# Altium PCB Gas Analyser O2 CO2.PcbDoc
Units mm, origin at the board's own origin, x right, y up, seen from the top; angles counter-clockwise.
Board outline 90 x 80 mm, 4 copper layers (Top Layer, Int1 (GND), Int2 (PWR), Bottom Layer), stack 1.369 mm thick; 96 components, 64 nets, 360 pads, 121 vias.
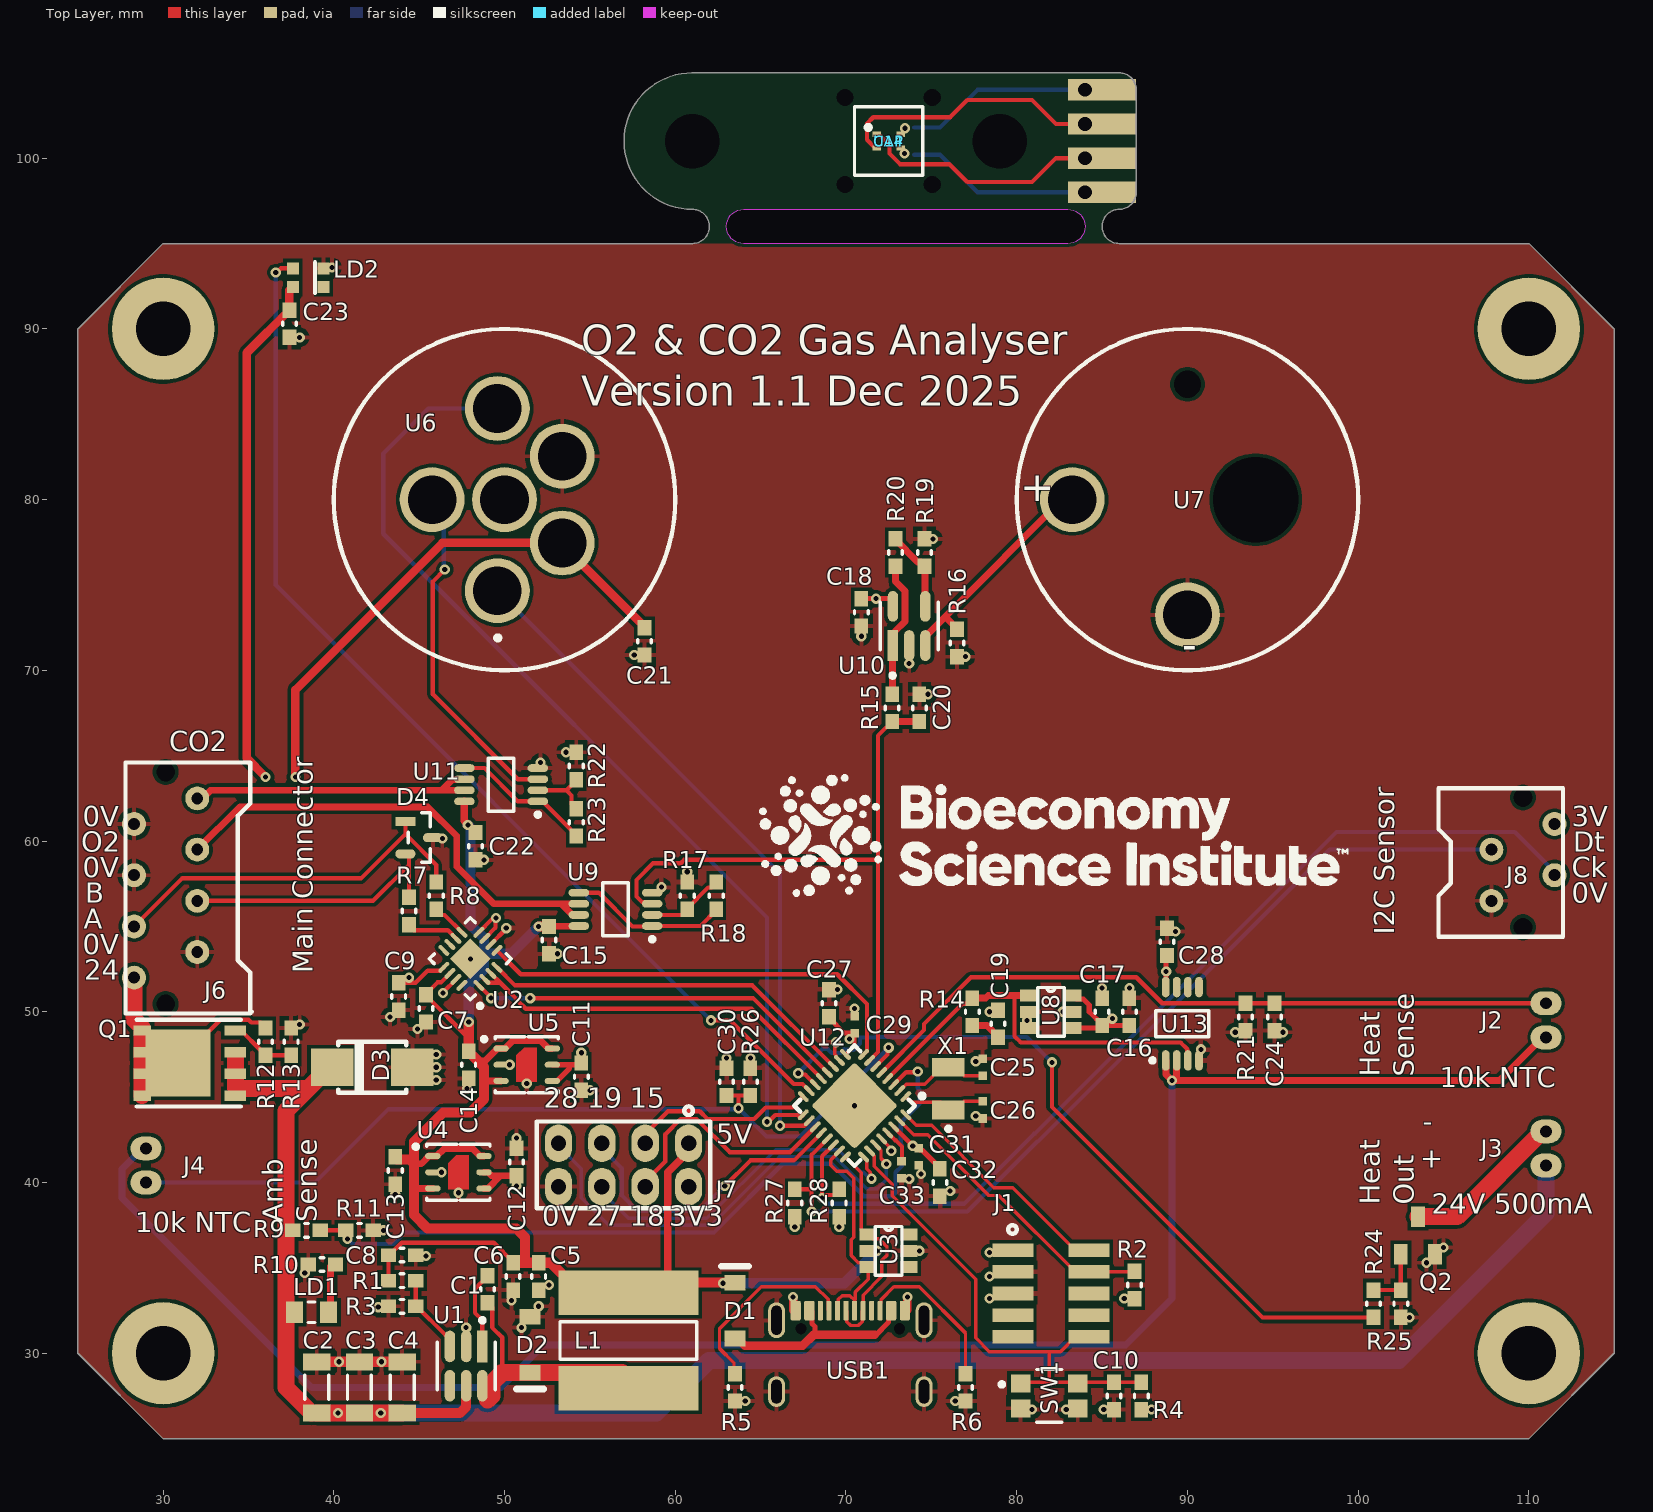
[diagram p0: Top Layer view]
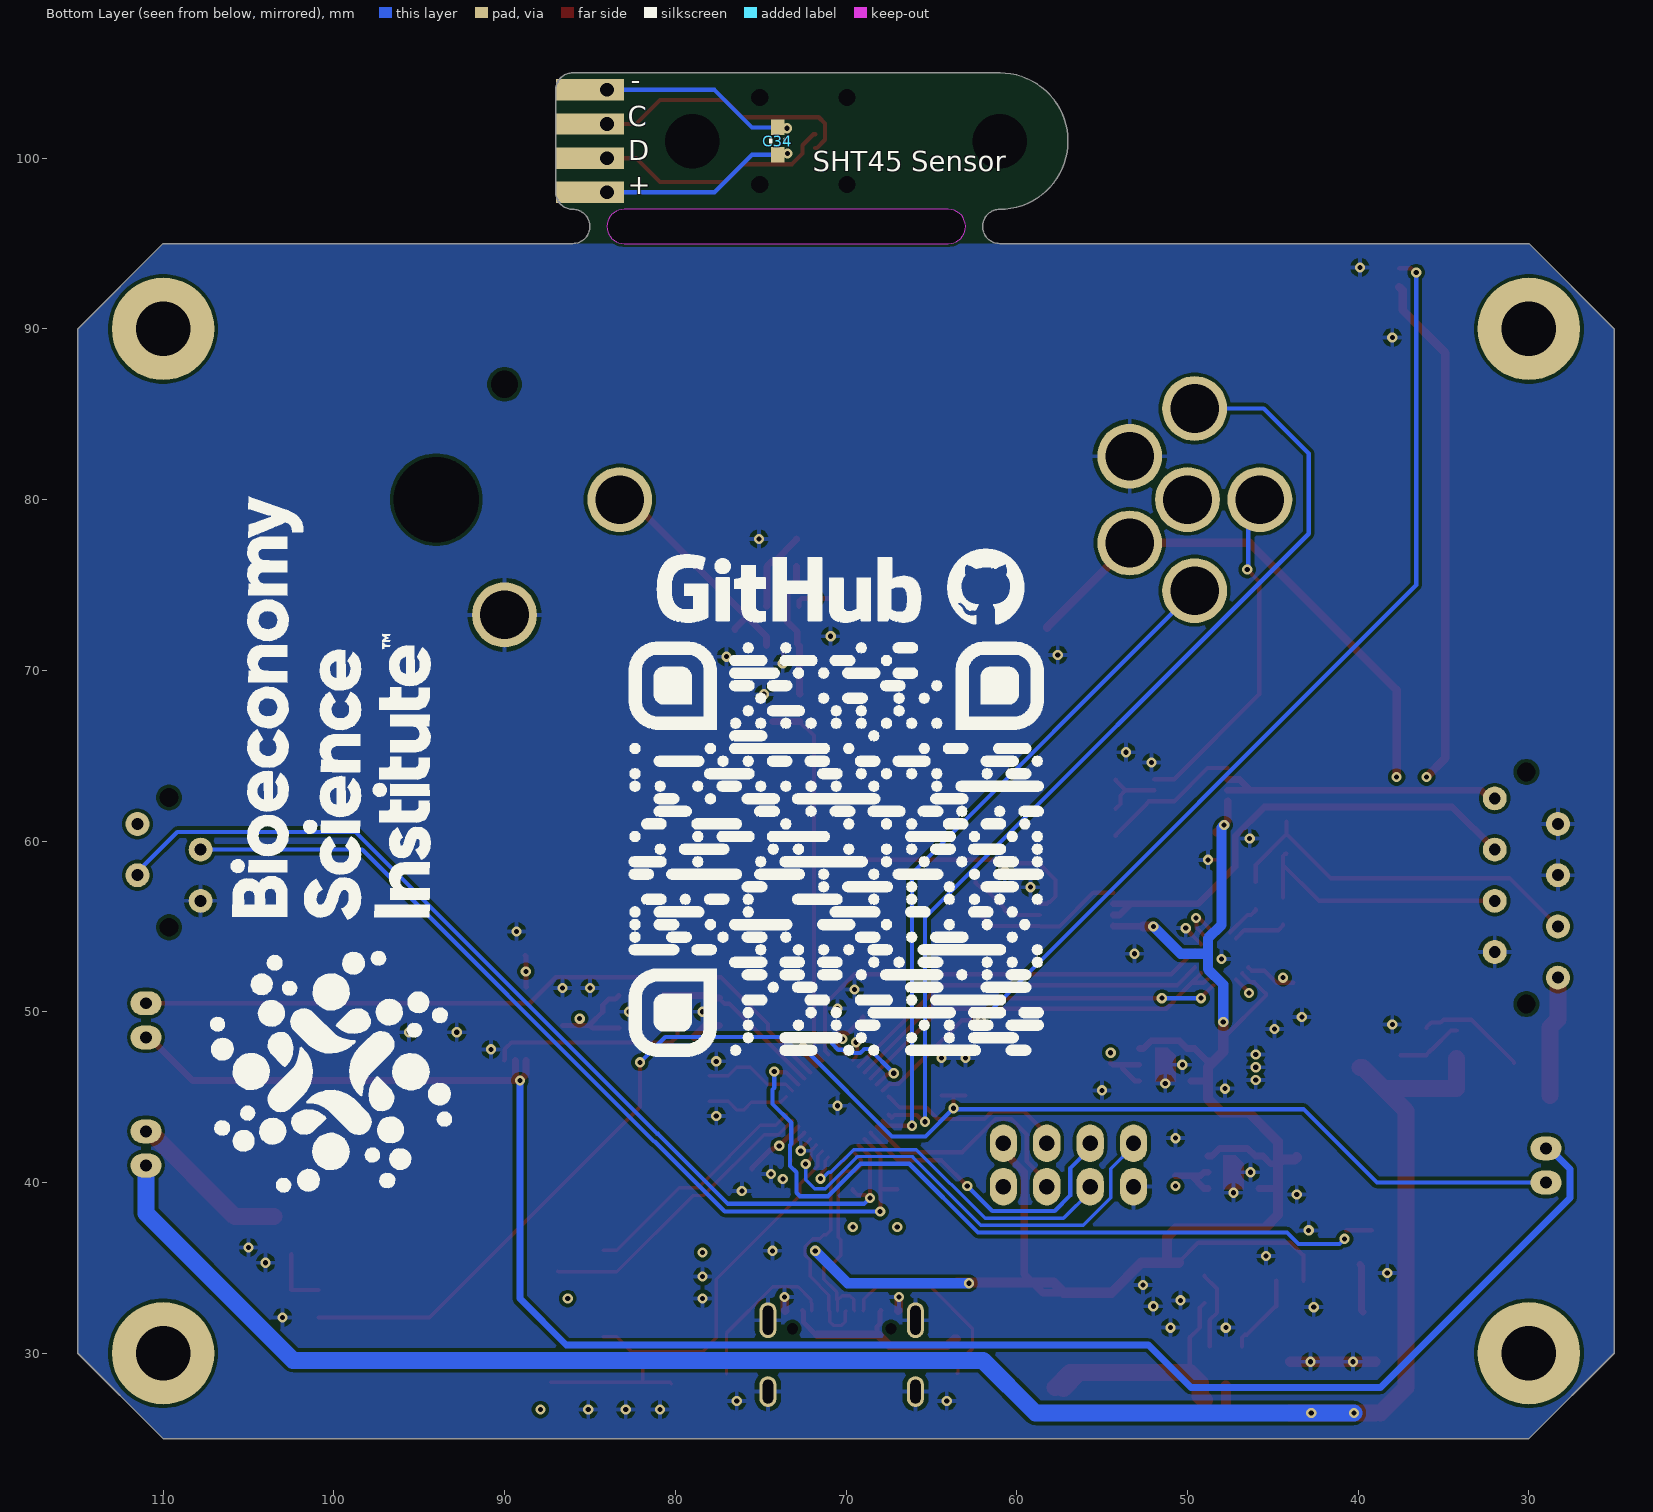
[diagram p1: Bottom Layer view, seen from below]
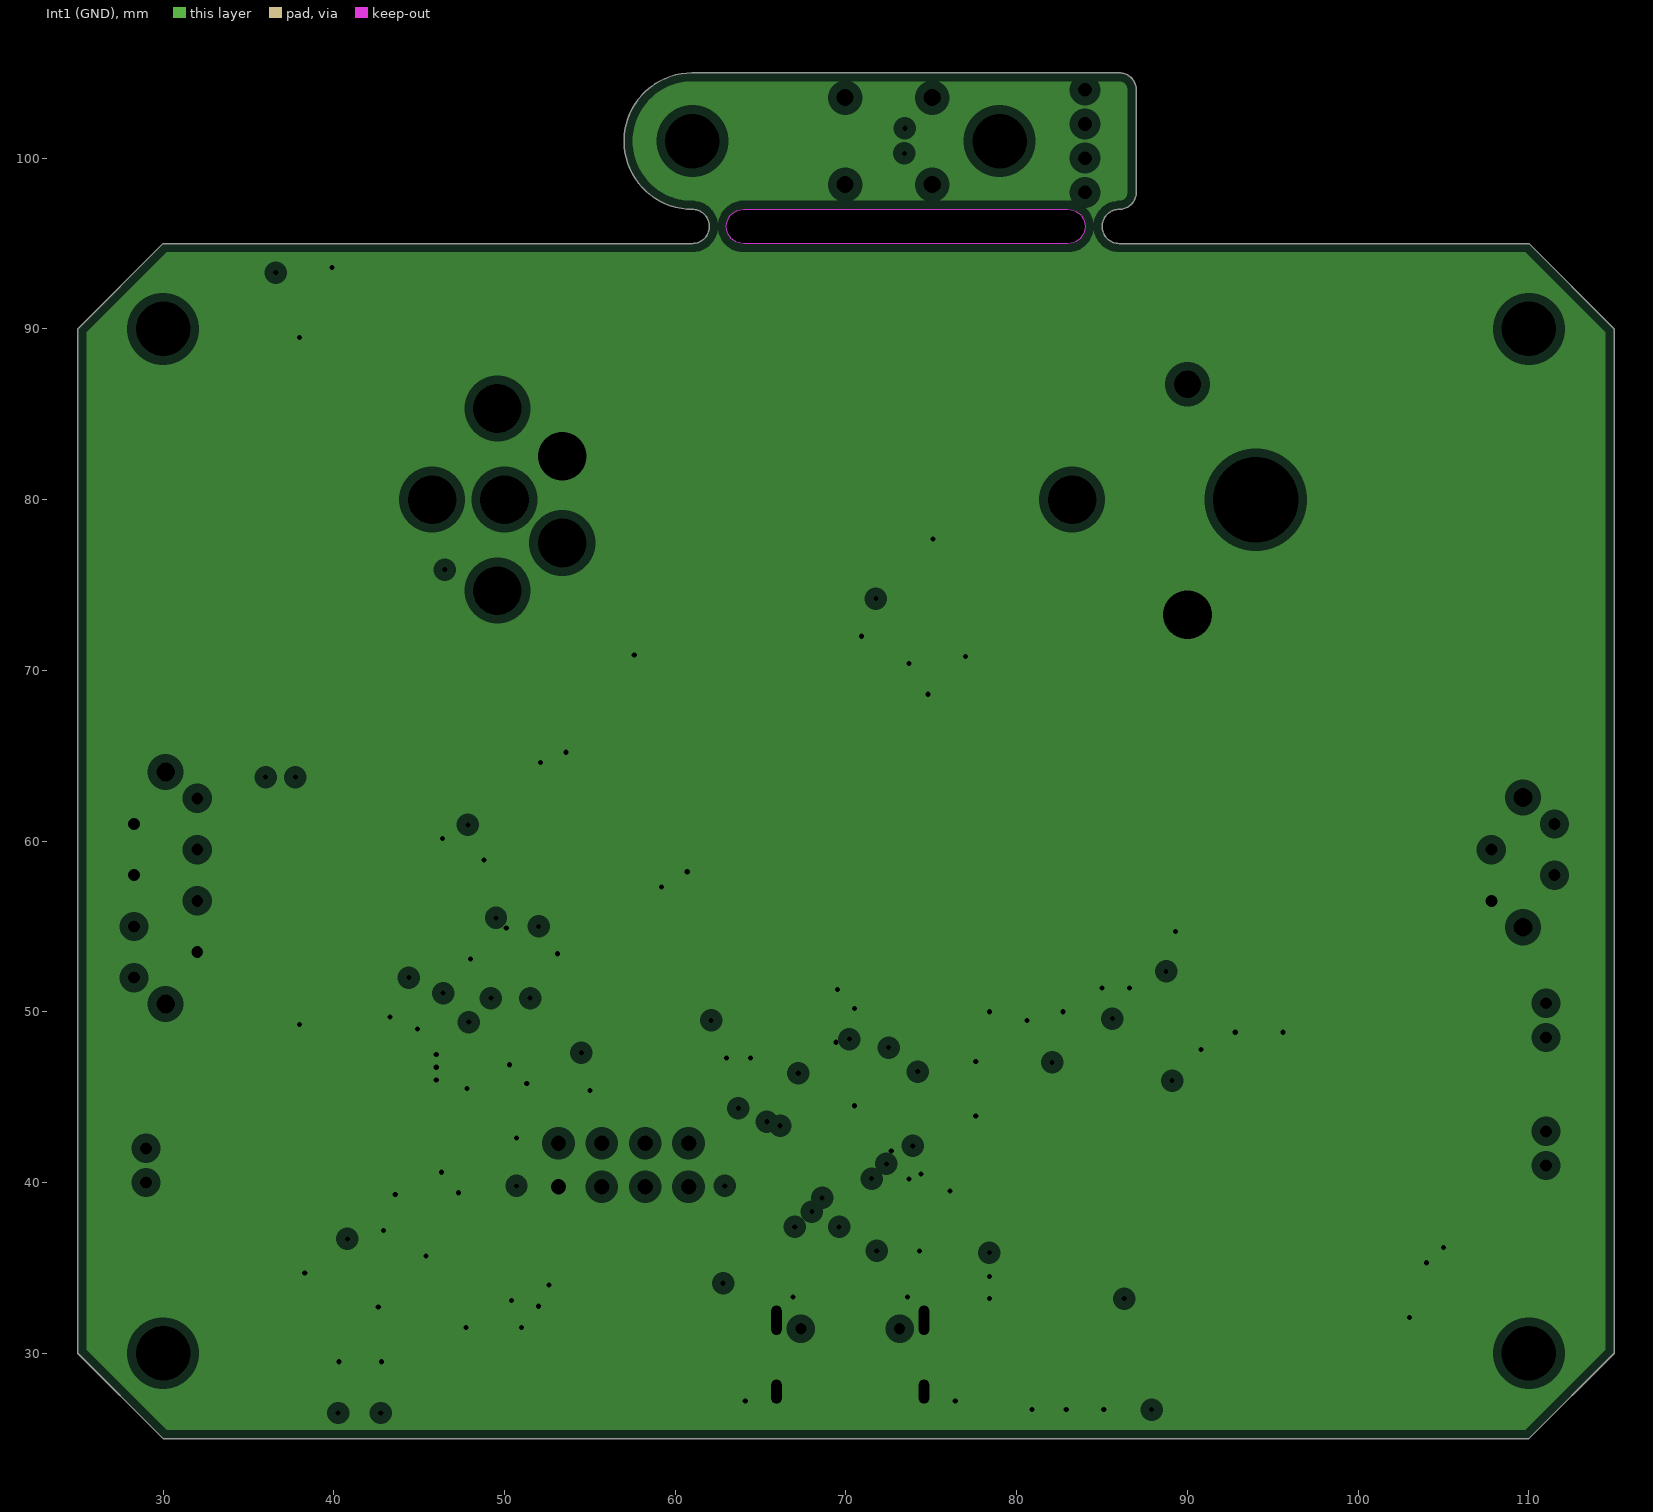
[diagram p2: Int1 (GND), clearances drawn from the general rule]
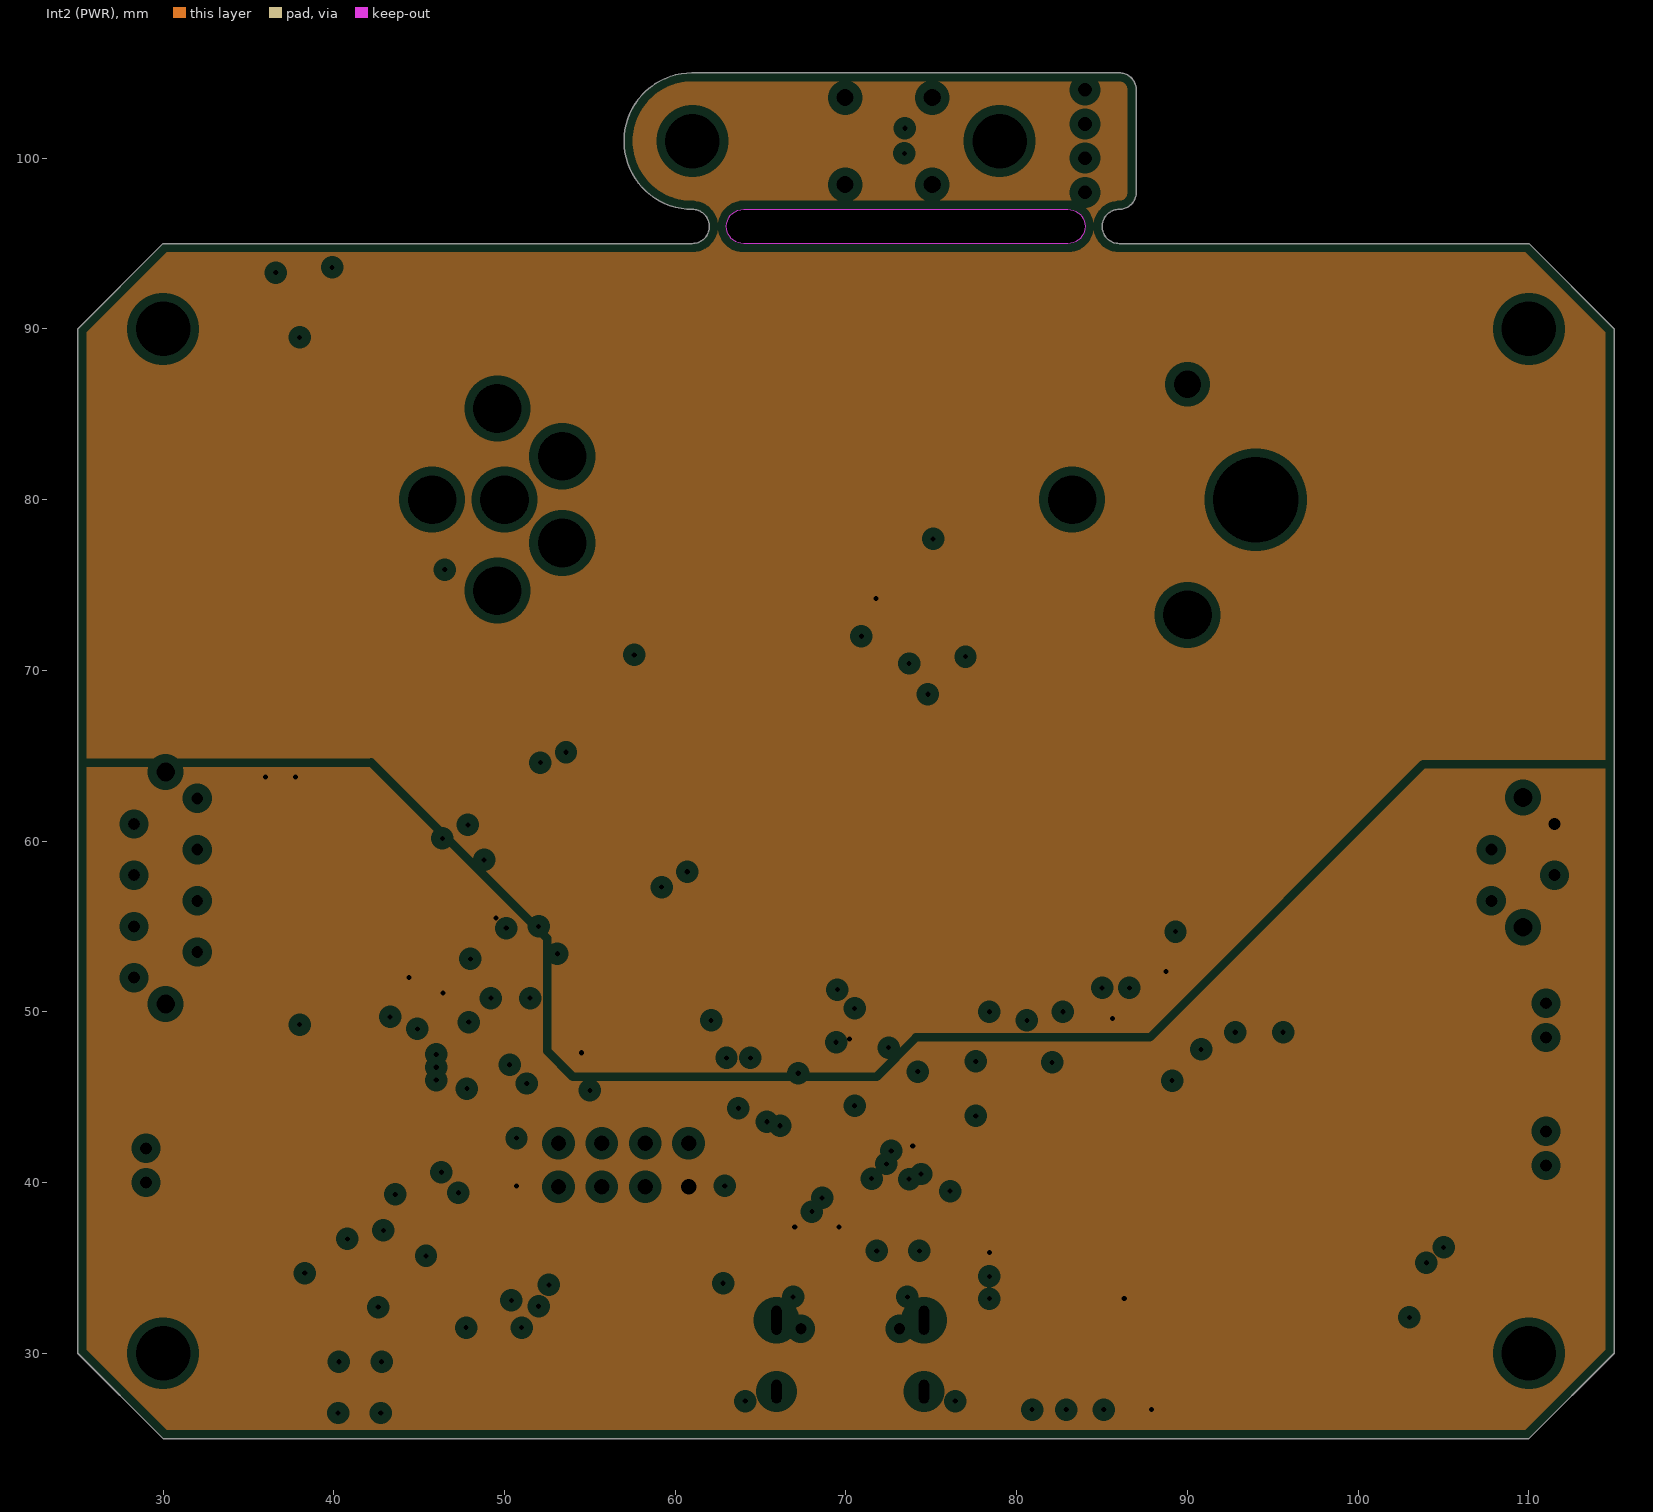
[diagram p3: Int2 (PWR), clearances drawn from the general rule]
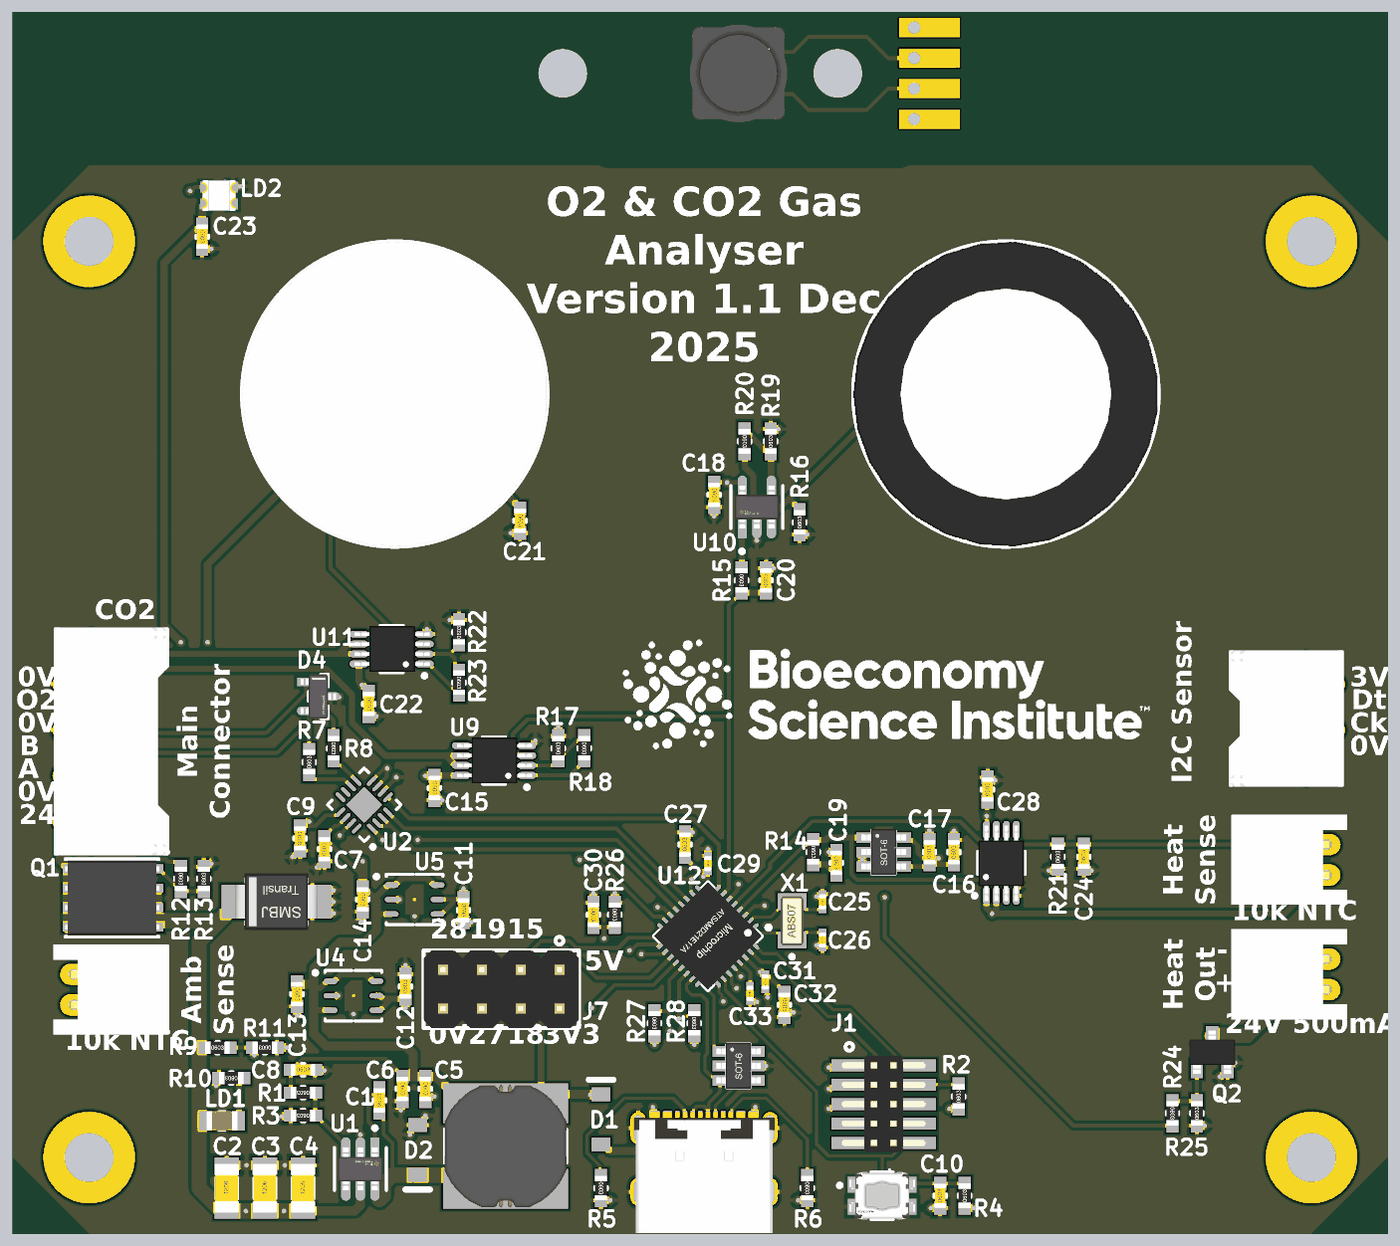
[diagram p4: 3D render of the assembled board from above, using the file's embedded part models]

## Layer stack, top to bottom
Top Solder: solder mask 0.0254, SM-001, Dk 4
Top Layer: signal copper 0.035
Dielectric 1: prepreg 0.1295, PP-017, Dk 4.3
Dielectric 2: prepreg 0.1295, PP-017, Dk 4.3
Int1 (GND): plane copper 0.035, net GND
Dielectric 3: core 0.7112, Core-039, Dk 4.8
Int2 (PWR): plane copper 0.035, net +3V3ANA
Dielectric 4: prepreg 0.1295, PP-017, Dk 4.3
Dielectric 5: prepreg 0.1295, PP-017, Dk 4.3
Bottom Layer: signal copper 0.035
Bottom Solder: solder mask 0.0254, SM-001, Dk 4

## Board outline
61,95 ccw(c61,96) 62,96 ccw(c61,96) 61,97 cw(c61,101) 57,101 cw(c61,101) 61,105 86,105 cw(c86,104) 87,104 87,98 cw(c86,98) 86,97 ccw(c86,96) 85,96 ccw(c86,96) 86,95 110,95 115,90 115,30 110,25 30,25 25,30 25,90 30,95
cut-out: 64,95 cw(c64,96) 63,96 cw(c64,96) 64,97 83,97 cw(c83,96) 84,96 cw(c83,96) 83,95

## Design rules (kind name [scope] priority, off if disabled: settings)
Clearance [All] p1: gap=0.2 ignorepadtopadclearanceinfootprint=FALSE except(0.1: SMDPad-Hole)
DiffPairsRouting [All] p1: maxlimit=0.254 minlimit=0.25 mostfreqgap=0.25 toplayer_minwidth=0.2 toplayer_maxwidth=0.381 toplayer_prefwidth=0.25 bottomlayer_minwidth=0.2 bottomlayer_maxwidth=0.381 bottomlayer_prefwidth=0.25 maxuncoupledlength=12.7
HoleSize [All] p1: absolutevalues=TRUE maxlimit=5 minlimit=0.3 maxpercent=80.000 minpercent=20.000
PlaneClearance [All] p1: clearance=0.508
PlaneConnect [All] p1: planeconnectstyle=Relief reliefexpansion=0.508 reliefentries=4 reliefconductorwidth=0.254 reliefairgap=0.254
PolygonConnect [All] p1: connectstyle=Relief reliefconductorwidth=0.254 reliefentries=4 polygonreliefangle="90 Angle" airgapwidth=0.254
RoutingVias [All] p1: holewidth=0.3 width=0.6 viastyle="Through Hole" minholewidth=0.3 minwidth=0.6 maxholewidth=0.711 maxwidth=1.27
SolderMaskExpansion SolderMaskExpansion_Components [InPadClass('All Pads')] p1: expansion=0.102 istentingtop=FALSE
SolderMaskExpansion SolderMaskExpansion_vias [All] p2: expansion=0.102 istentingtop=TRUE
SupplyNets "Schematic Supply Nets_10" [InNet('GND_S')] p1: voltage=0.000
SupplyNets "Schematic Supply Nets_9" [InNet('+3V3_S')] p2: voltage=0.000
SupplyNets "Schematic Supply Nets_8" [InNet('VBUS')] p3: voltage=0.000
SupplyNets "Schematic Supply Nets_7" [InNet('GND')] p4: voltage=0.000
SupplyNets "Schematic Supply Nets_6" [InNet('+24V')] p5: voltage=0.000
SupplyNets "Schematic Supply Nets_5" [InNet('AREF_BUF')] p6: voltage=0.000
SupplyNets "Schematic Supply Nets_4" [InNet('+24V_IN')] p7: voltage=0.000
SupplyNets "Schematic Supply Nets_3" [InNet('+3V3ANA')] p8: voltage=0.000
SupplyNets "Schematic Supply Nets_2" [InNet('AREF')] p9: voltage=0.000
SupplyNets "Schematic Supply Nets_1" [InNet('+5V')] p10: voltage=0.000
SupplyNets "Schematic Supply Nets" [InNet('+3V3')] p11: voltage=0.000
Width [All] p1: maxlimit=10 minlimit=0.2 preferedwidth=0.25
26 further rules are at their usual default settings.

## Classes and differential pairs
differential pair USB_D: +USB_D_P -USB_D_N

## Components (designator, comment, footprint, x,y, rotation, side; value= is the part's Value field where it differs from the comment)
C1 "Capacitor" 0603_CAP 49,33.75 r90 top value=100nF
C2 "Capacitor" 1206_CAP 39,28 r90 top value=22µF
C3 "Capacitor" 1206_CAP 41.5,28 r90 top value=22µF
C4 "Capacitor" 1206_CAP 44,28 r90 top value=22µF
C5 "Capacitor" 0603_CAP 52,34.5 r270 top value=10µF
C6 "Capacitor" 0603_CAP 50.5,34.5 r270 top value=10µF
C7 "Capacitor" 0603_CAP 45.4,50.2 r90 top value=100nF
C8 "Capacitor" 0603_CAP 44,35.75 r0 top value=100nF
C9 "Capacitor" 0603_CAP 43.8,50.9 r90 top value=100nF
C10 "Capacitor" 0603_CAP 85.7,27.5 r90 top value=100nF
C11 "Capacitor" 0603_CAP 54.5,46.2 r270 top value=10µF
C12 "Capacitor" 0603_CAP 50.7,41.2 r90 top value=10µF
C13 "Capacitor" 0603_CAP 43.6,40.7 r270 top value=10µF
C14 "Capacitor" 0603_CAP 47.9,46.9 r270 top value=10µF
C15 "Capacitor" 0603_CAP 52.6,54.2 r270 top value=100nF
C16 "Capacitor" 0603_CAP 86.6,50 r90 top value=2.2µF
C17 "Capacitor" 0603_CAP 85,50 r90 top value=100nF
C18 "Capacitor" 0603_CAP 70.9,73.4 r270 top value=100nF
C19 "Capacitor" 0603_CAP 78.9,49.3 r270 top value=2.2µF
C20 "Capacitor" 0603_CAP 74.3,67.8 r90 top value=1uF
C21 "Capacitor" 0603_CAP 58.2,71.7 r270 top value=10µF
C22 "Capacitor" 0603_CAP 48.3,59.7 r270 top value=100nF
C23 "Capacitor" 0603_CAP 37.4,90.3 r270 top value=10uF
C24 "Capacitor" 0603_CAP 95.1,49.7 r90 top value=100nF
C25 "Capacitor" 0402_CAP 78,46.75 r90 top value=22pF
C26 "Capacitor" 0402_CAP 78,44.25 r90 top value=22pF
C27 "Capacitor" 0603_CAP 69,50.5 r90 top value=10uF
C28 "Capacitor" 0603_CAP 88.8,54.1 r90 top value=100nF
C29 "Capacitor" 0402_CAP 70.5,49.25 r90 top value=100nF
C30 "Capacitor" 0603_CAP 63,45.9 r270 top value=100nF
C31 "Capacitor" 0402_CAP 74.25,41.5 r270 top value=100nF
C32 "Capacitor" 0603_CAP 75.5,40 r270 top value=10uF
C33 "Capacitor" 0402_CAP 73.25,40.75 r270 top value=1uF
C34 "Capacitor" 0603_CAP 74,101 r270 bottom value=1uF
CAP "SF2" SF2-Footprint-1 72.5,101 r0 top
D1 "Diode" SOD-123 63.5,32.5 r90 top
D2 "Diode" SOD-123 51.5,30.5 r270 top
D3 "Transil" SMBJ 42.25,46.75 r180 top
D4 "CDSOT23-SM712" FP-SOT23-IPC_C 45,60.2 r0 top
J1 "SWD header" DIP10_1.27_M_SMD 82,33.5 r0 top
J2 "Heater NTC" "2mm RA S2B-PH-K-S" 111,49.5 r90 top
J3 "Heater Output" "2mm RA S2B-PH-K-S" 111,42 r90 top
J4 "Ambient NTC" "2mm RA S2B-PH-K-S" 29,41 r270 top
J6 "Main" "8P RA MOLEX Clik-MATE 1.5mm" 28.3,52 r90 top
J7 "8_Pin" "8P DIP Male Header 2.54mm" 60.78,42.3 r180 top
J8 "I2C Exp" "4P RA MOLEX Clik-MATE 1.5mm" 111.5,61 r270 top
L1 "Inductor" BOUR-SRN8040_V 57.25,30.75 r90 top value=22µH
LD1 "LED" 0805 38.7,32.4 r180 top
LD2 "WS2812B" WS2812B-2020 38.5,93 r0 top
Q1 "PMOS GDS" "PowerDI 5060-8" 31.5,47 r90 top
Q2 "NMOS" SOT-23 103.5,36.9 r0 top
R1 "Resistor" 0603_RES 44,34.25 r180 top value=100k
R2 "Resistor" 0603_RES 86.9,34 r90 top value=10k
R3 "Resistor" 0603_RES 44,32.75 r180 top value=18k
R4 "Resistor" 0603_RES 87.3,27.5 r90 top value=10k
R5 "Resistor" 0603_RES 63.5,28 r270 top value=5k1
R6 "Resistor" 0603_RES 77,28 r270 top value=5k1
R7 "Resistor" 0603_RES 44.4,55.9 r90 top value=10R
R8 "Resistor" 0603_RES 46,56.8 r270 top value=10R
R9 "Resistor" 0603_RES 38.4,37.2 r0 top value=100k
R10 "Resistor" 0603_RES 39.3,35.2 r180 top value=5k1
R11 "Resistor" 0603_RES 41.5,37.2 r180 top value=18k
R12 "Resistor" 0603_RES 36,48.25 r270 top value=100k
R13 "Resistor" 0603_RES 37.5,48.25 r90 top value=100k
R14 "Resistor" 0603_RES 77.4,50 r270 top value=62R
R15 "Resistor" 0603_RES 72.7,67.8 r270 top value=10k
R16 "Resistor" 0603_RES 76.5,71.6 r90 top value=100R
R17 "Resistor" 0603_RES 60.7,56.8 r90 top value=10k
R18 "Resistor" 0603_RES 62.4,56.8 r270 top value=10k
R19 "Resistor" 0603_RES 74.6,76.9 r90 top value=1k
R20 "Resistor" 0603_RES 72.9,76.9 r270 top value=100k
R21 "Resistor" 0603_RES 93.4,49.7 r90 top value=10k
R22 "Resistor" 0603_RES 54.2,64.4 r90 top value=10k
R23 "Resistor" 0603_RES 54.2,61.1 r270 top value=10k
R24 "Resistor" 0603_RES 100.9,32.9 r270 top value=100R
R25 "Resistor" 0603_RES 102.5,32.9 r90 top value=100k
R26 "Resistor" 0603_RES 64.4,45.9 r270 top value=10k
R27 "Resistor" 0603_RES 67,38.8 r270 top value=2k2
R28 "Resistor" 0603_RES 69.6,38.8 r270 top value=2k2
SW1 "EVP-AAN02Q" FP-EVP-AAN02Q-MFG 81.9,27.5 r0 top
U1 "LMR14010ADDCR" FP-DDC0006A-IPC_A 47.75,29.25 r270 top
U2 "THVD1424RGTR" QFN50P300X300X100_HS-17N 48,53.1 r135 top
U3 "NUP4304MR6" TSOP-6 72.5,36 r0 top
U4 "NCP606MN33T2G" QFN95P330X295X100_HS-7N 47.3,40.6 r0 top
U5 "NCP606MN33T2G" QFN95P330X295X100_HS-7N 51.3,46.9 r0 top
U6 "SGX-INIR2-CD100" SGX-INIR2-CD100-Footprint-1 50,80 r0 top
U7 "SGX-4OX" SGX-4OX-Footprint-1 90,80 r0 top
U8 "MCP1501-20 (2.048V)" SOT-6 82,50 r0 top
U9 "MCP6032-E/MS" MSOP-MS8_M 56.5,56 r180 top
U10 "OPA387DBVR" FP-DBV0005A-IPC_A 73.7,72.6 r90 top
U11 "MCP6032-E/MS" MSOP-MS8_M 49.8,63.3 r180 top
U12 "ATSAMD21E18A" "32P QFN" 70.5,44.5 r225 top
U13 "MCP6032-E/MS" MSOP-MS8_M 89.7,49.3 r90 top
U14 "SHT45" SHT45-AD1B-R3-Footprint-1 72.5,101 r0 top
USB1 "USB C" GT-USB-7010ASV 67.05,32.5 r0 top
X1 "32.768KHz" ABRA-ABS07-2_V 76,45.5 r90 top

## Footprints (in the part's own frame and the unit in brackets; to place one, negate y for a bottom-side part, rotate by r counter-clockwise, add the part's x,y. Pads: shape width x height; smd on the part's side, far side on the other; paste and mask are expansions set on the pad)
"2mm RA S2B-PH-K-S" [mm] "JST right angle header"
  oval 1.4x1.8 hole 0.7: 1(-1,0) 2(1,0)
  body extent -2.95,-1.35 2.95,6.25, height 4.8
"4P RA MOLEX Clik-MATE 1.5mm" [mm] "5031750400"
  round 1.4 hole 0.7: 1(0,0) 2(1.5,-3.7) 3(3,0) 4(4.5,-3.7)
  round 0 hole 1.1 unplated: ""(-1.55,-1.85) ""(6.05,-1.85)
  silkscreen extent -2.1,-6.8 6.6,0.5, body extent -2.2,-6.8 6.7,0.45, height 7
"8P DIP Male Header 2.54mm" [mm]
  oval 1.6x2.2 hole 0.9 mask+0.01: 1(0,0) 2(0,2.54) 3(2.54,0) 4(2.54,2.54) 5(5.08,0) 6(5.08,2.54) 7(7.62,0) 8(7.62,2.54)
  silkscreen extent -1.27,-2.16 8.89,3.81, body extent -1.27,-1.27 8.89,3.81, height 8.5
"8P RA MOLEX Clik-MATE 1.5mm" [mm] "5031750800"
  round 1.4 hole 0.7: 1(0,0) 2(1.5,-3.7) 3(3,0) 4(4.5,-3.7) 5(6,0) 6(7.5,-3.7) 7(9,0) 8(10.5,-3.7)
  round 0 hole 1.1 unplated: ""(-1.55,-1.85) ""(12.05,-1.85)
  silkscreen extent -2.1,-6.8 12.6,0.5, body extent -2.2,-6.78 12.7,0.47, height 7
"32P QFN" [mm]
  oval 0.8x0.25 smd mask+0.05: 1(-2.5,1.75) 2(-2.5,1.25) 3(-2.5,0.75) 4(-2.5,0.25) 5(-2.5,-0.25) 6(-2.5,-0.75) 7(-2.5,-1.25) 8(-2.5,-1.75) 17(2.5,-1.75) 18(2.5,-1.25) 19(2.5,-0.75) 20(2.5,-0.25) 21(2.5,0.25) 22(2.5,0.75) 23(2.5,1.25) 24(2.5,1.75)
  oval 0.25x0.8 smd mask+0.05: 9(-1.75,-2.5) 10(-1.25,-2.5) 11(-0.75,-2.5) 12(-0.25,-2.5) 13(0.25,-2.5) 14(0.75,-2.5) 15(1.25,-2.5) 16(1.75,-2.5) 25(1.75,2.5) 26(1.25,2.5) 27(0.75,2.5) 28(0.25,2.5) 29(-0.25,2.5) 30(-0.75,2.5) 31(-1.25,2.5) 32(-1.75,2.5)
  rrect10% 3.6x3.6 smd mask+0.05: PAD(0,0)
  silkscreen extent -3.34,-2.5 2.5,2.54, body extent -2.5,-2.5 2.5,2.5, height 0.65
0402_CAP [mm]
  rect 0.5x0.5 smd: 1(-0.5,0) 2(0.5,0)
  body extent -0.5,-0.25 0.5,0.25, height 0.5
0603_CAP [mm] "SMD Capacitor 0603"
  rect 0.9x0.8 smd: 1(-0.8,0) 2(0.8,0)
  silkscreen extent -0.1,-0.4 0.1,0.4, body extent -0.8,-0.4 0.8,0.4, height 0.8
0603_RES [mm] "SMD Resistor 0603"
  rect 0.9x0.8 smd: 1(-0.8,0) 2(0.8,0)
  silkscreen extent -0.1,-0.4 0.1,0.4, body extent -0.8,-0.4 0.8,0.4, height 0.45
0805 [mm] "SMD Generic 0805"
  rect 1x1.25 smd: 1(-1,0) 2(1,0)
  silkscreen extent -0.2,-0.6 0.2,0.6, body extent -1,-0.62 1,0.63, height 0.5
1206_CAP [mm] "SMD Capacitor 1206"
  rect 1x1.6 smd: 1(-1.5,0) 2(1.5,0)
  silkscreen extent -0.7,-0.7 0.7,0.7, body extent -1.6,-0.8 1.6,0.8, height 1.6
ABRA-ABS07-2_V [mm] "SMD, 2-Leads, Body 3.2x1.5mm"
  rect 1.1x1.9 smd: 1(-1.25,0) 2(1.25,0)
  silkscreen extent -2.47,-0.13 -2.23,0.12, body extent -1.6,-0.75 1.6,0.75, height 0.9
BOUR-SRN8040_V [mm] "SMD, 2-Leads, Body 8x8mm"
  rect 2.6x8.2 smd: 1(-2.8,0) 2(2.8,0)
  silkscreen extent -1.1,-4 1.1,4, body extent -4.01,-4 4.01,4, height 4
DIP10_1.27_M_SMD [mm] "1.27mm pitch 2 x 5 male header"
  rect 2.4x0.8 smd: 1(-2.222,2.54) 2(2.222,2.54) 3(-2.222,1.27) 4(2.222,1.27) 5(-2.222,0) 6(2.222,0) 7(-2.222,-1.27) 8(2.222,-1.27) 9(-2.222,-2.54) 10(2.222,-2.54)
  silkscreen extent -2.5,3.5 -2,4, body extent -2.75,-3.17 2.75,3.18, height 4.5
FP-DBV0005A-IPC_A [mm]
  rect 1.805x0.612 smd paste+0 mask+0: 1(-1.15,0.95)
  rrect100% 1.805x0.612 smd paste+0 mask+0: 2(-1.15,0) 3(-1.15,-0.95) 4(1.15,-0.95) 5(1.15,0.95)
  silkscreen extent -3.03,-1.7 1.4,1.7, body extent -2.55,-1.95 2.55,1.95, height 0.25
FP-DDC0006A-IPC_A [mm]
  rect 1.854x0.612 smd paste+0 mask+0: 1(-1.15,0.95)
  rrect100% 1.854x0.612 smd paste+0 mask+0: 2(-1.15,0) 3(-1.15,-0.95) 4(1.15,-0.95) 5(1.15,0) 6(1.15,0.95)
  silkscreen extent -2.8,-1.7 1.4,1.7, body extent -2.58,-1.95 2.58,1.95, height 0.25
FP-EVP-AAN02Q-MFG [mm]
  rect 1.15x1.05 smd paste+0 mask+0: 1(-1.675,0.725) 1(1.675,0.725) 2(-1.675,-0.725) 2(1.675,-0.725)
  silkscreen extent -2.9,-1.55 0.72,1.55, body extent -2.35,-1.65 2.35,1.65, height 0.25
FP-SOT23-IPC_C [mm]
  rect 1.181x0.532 smd paste+0 mask+0: 1(-0.808,0.95)
  rrect100% 1.181x0.532 smd paste+0 mask+0: 2(-0.808,-0.95) 3(0.808,0)
  silkscreen extent -0.65,-1.45 0.65,1.45, body extent -1.5,-1.55 1.5,1.55, height 0.25
GT-USB-7010ASV [mm]
  rrect50% 0.4x1.15 smd: A1(-0.1,0) A4(0.7,0) A9(5.5,0) A12(6.3,0) B1(6.5,0) B4(5.7,0) B9(0.9,0) B12(0.1,0)
  rrect50% 0.3x1.15 smd: A5(1.95,0) A6(2.95,0) A7(3.45,0) A8(4.45,0) B5(4.95,0) B6(3.95,0) B7(2.45,0) B8(1.45,0)
  oval 1x1.8 hole 0.6 slot 1.4 at 90 deg paste+0: EXT_SHLD(-1.12,-4.745) EXT_SHLD(7.52,-4.745)
  oval 1x2.1 hole 0.6 slot 1.7 at 90 deg paste+0: EXT_SHLD(-1.12,-0.565) EXT_SHLD(7.52,-0.565)
  round 0 hole 0.65 unplated: ""(0.31,-1.065) ""(6.09,-1.065)
  body extent -1.4,-7.45 7.8,0.5, height 3.21
MSOP-MS8_M [mm] "TSOP, 8-Leads, Body 3x3mm, Pitch 0.65mm, IPC Low Density"
  oval 1.2x0.45 smd: 1(-2.15,0.975) 2(-2.15,0.325) 3(-2.15,-0.325) 4(-2.15,-0.975) 5(2.15,-0.975) 6(2.15,-0.325) 7(2.15,0.325) 8(2.15,0.975)
  silkscreen extent -2.27,-1.55 0.75,1.87, body extent -2.49,-1.5 2.43,1.5, height 1.2
"PowerDI 5060-8" [mm] "Power MOSFET"
  rect 0.61x1.02 smd: D(-1.905,2.731) D(-0.635,2.73) D(0.635,2.73) D(1.905,2.731)
  rect 3.91x3.81 smd: D(0,0.622)
  rect 0.61x1.27 smd: G(1.905,-2.73) S(-1.905,-2.73) S(-0.635,-2.73) S(0.635,-2.73)
  silkscreen extent -2.54,-3.05 2.54,3.05, body extent -2.57,-3.08 2.58,3.07, height 0.96
QFN50P300X300X100_HS-17N [mm] "QFN, 16-Leads, Body 3.00x3.00mm, Pitch 0.50mm, Thermal Pad 1.68x1.68mm, IPC Medium Density"
  oval 0.8x0.25 smd: 1(-1.45,0.75) 2(-1.45,0.25) 3(-1.45,-0.25) 4(-1.45,-0.75) 9(1.45,-0.75) 10(1.45,-0.25) 11(1.45,0.25) 12(1.45,0.75)
  oval 0.25x0.8 smd: 5(-0.75,-1.45) 6(-0.25,-1.45) 7(0.25,-1.45) 8(0.75,-1.45) 13(0.75,1.45) 14(0.25,1.45) 15(-0.25,1.45) 16(-0.75,1.45)
  rect 1.68x1.68 smd: PAD(0,0)
  silkscreen extent -2.47,-1.7 1.7,1.7, body extent -1.55,-1.55 1.55,1.55, height 1
QFN95P330X295X100_HS-7N [mm] "QFN, 6-Leads, Body 3.30x2.95mm, Pitch 0.95mm, Thermal Pad 1.20x2.00mm, IPC Medium Density"
  oval 0.9x0.35 smd: 1(-1.5,0.95) 2(-1.5,0) 3(-1.5,-0.95) 4(1.5,-0.95) 5(1.5,0) 6(1.5,0.95)
  round 0.025 smd: PAD(0,0)
  Top Layer region: -0.6,-1 0.6,-1 0.6,1 -0.143,1 -0.6,0.543
  silkscreen extent -2.62,-1.65 1.85,1.65, body extent -1.7,-1.5 1.7,1.5, height 1
SF2-Footprint-1 [mm]
  round 0 hole 1 unplated: ""(-2.55,-2.55) ""(-2.55,2.55) ""(2.55,-2.55) ""(2.55,2.55)
  silkscreen extent -2,-2 2,2, body extent -3.19,-3.2 3.19,3.19, height 2.03
SGX-4OX-Footprint-1 [mm]
  round 3.8 hole 2.85: 1(0,-6.75) 2(-6.75,0)
  round 0 hole 1.6 unplated: ""(0,6.75)
  silkscreen extent -10,-10 10,10, body extent -10,-10 9.99,10, height 17.2
SGX-INIR2-CD100-Footprint-1 [mm]
  round 3.8 hole 2.85: 1(-0.42,-5.335) 2(3.38,-2.54) 3(3.38,2.54) 4(-0.42,5.335) 5(-4.24,0) 6(0,0)
  silkscreen extent -10,-10 10,10, body extent -10,-10 9.99,10, height 17.2
SHT45-AD1B-R3-Footprint-1 [mm]
  rect 0.5x0.3 smd mask+0.01: 1(-0.7,0.4) 2(-0.7,-0.4) 3(0.7,-0.4) 4(0.7,0.4)
  silkscreen extent -1.34,0.66 -1.06,0.94, body extent -0.75,-0.75 0.75,0.75, height 0.54
SMBJ [mm] "Transil"
  rect 2.5x2.2 smd: 1(-2.35,0) 2(2.35,0)
  silkscreen extent -2,-1.5 2,1.5, body extent -2.7,-1.85 2.7,1.85, height 2.2
SOD-123 [mil] "SOD123, 2-Leads, Body 2.7x1.6mm, Height 1.35mm"
  rect 35.98x47.99 smd: 1(64.5,0) 2(-64.5,0)
  silkscreen extent 102,-31 102,31, body extent -53,-31 53,31, height 53
SOT-6 [mm]
  rect 1x0.7 smd: 1(-1.3,0.95) 2(-1.3,0) 3(-1.3,-0.95) 4(1.3,-0.95) 5(1.3,0) 6(1.3,0.95)
  silkscreen extent -0.78,-1.43 0.78,1.43, body extent -1.46,-1.49 1.46,1.51, height 1
SOT-23 [mm]
  rect 0.8x1.2 smd: 1(-1,-1.1) 2(0,1.1) 3(1,-1.1)
  body extent -1.5,-1.42 1.5,1.42, height 1.2
TSOP-6 [mm] "TSOP-6 for NUP4304MR6"
  rect 1x0.7 smd: 1(-1.2,0.95) 2(-1.2,0) 3(-1.2,-0.95) 4(1.2,-0.95) 5(1.2,0) 6(1.2,0.95)
  silkscreen extent -0.78,-1.43 0.78,1.43, body extent -1.46,-1.49 1.46,1.51, height 1
WS2812B-2020 [mm]
  rect 0.7x0.7 smd mask+0.01: 1(-0.9,-0.55) 2(0.9,-0.55) 3(0.9,0.55) 4(-0.9,0.55)
  silkscreen extent 0.4,-0.9 0.4,0.9, body extent -1.1,-1 1.1,1, height 0.86

## Part data
C1 C2 C3 C4 C5 C6 C7 C8 C9 C10 C11 C12 C13 C14 C15 C16 C17 C18 C19 C20 C21 C22 C23 C24 C25 C26 C27 C28 C29 C30 C31 C32 C33 C34: library part CMP-001-00172-2, "SMD Capacitor", Component Type=Standard, Design Item ID=Capacitor, Pins=2, Source=Discrete.SchLib
CAP: library part CMP-010-00005-1, "Sensirion SHT cap for SHT4x sensors"
D1 D2: library part CMP-004-00083-4, "SMD Diode", Component Type=Standard, Design Item ID=Diode, Pin Count=2, Pins=2, Source=Discrete.SchLib
D3: library part CMP-079-000108-2, "Transient Voltage Suppressor", Rated Voltage=33V, Component Type=Standard, Design Item ID=Transil, MFN=SMBJ33A, Pin Count=2, Source=Discrete.SchLib
D4: library part CDSOT23-SM712-3, "Trans Voltage Suppressor Diode, 400W, 7V V(RWM), Bidirectional, 2 Element, Silicon", Breakdown Voltage-Nom=7.5V, Clamping Voltage-Max=19V, Non-rep Peak Rev Power Dis-Max=400W, Package Body Material=Plastic, Package Shape=Rectangular, Package Style="SMALL OUTLINEMeter", Rep Pk Reverse Voltage-Max=7V, Diode Element Material=SILICON, Diode Type="TRANS VOLTAGE SUPPRESSOR", JESD-30 Code=R-PDSO-G3, JESD-609 Code=e3, Min Breakdown Voltage=7.5V, Moisture Sensitivity Level=1, Number of Elements=2, Pins=3, Polarity=Bidirectional, Qualification Status="Not Qualified", Reach SVHC Compliant=Yes, Reference Standard=IEC-61000-4-2, RoHS Compliant=Yes, Surface Mount=Yes, Technology=AVALANCHE, Terminal Finish=Tin, Terminal Form="Gull Wing", Terminal Position=DUAL
J1: library part CMP-002-00170-1, "10 Pin Connector", Component Type=Standard, Design Item ID=10_Pin, Pin Count=10, Pins=10, Source=Connectors.SchLib
J2 J3 J4: library part CMP-002-00173-4, "2 Pin Connector", Component Type=Standard, Design Item ID=2_Pin, Pin Count=2, Pins=2, Source=Connectors.SchLib
J6: library part CMP-002-00183-3, "8 Pin Connector", Component Type=Standard, Design Item ID=8_Pin, Pin Count=8, Pins=8, Source=Connectors.SchLib
J7: library part CMP-002-00183-4, "8 Pin Connector", Component Type=Standard, Design Item ID=8_Pin, Pin Count=8, Pins=8, Source=Connectors.SchLib
J8: library part CMP-002-00177-3, "4 Pin Connector", Component Type=Standard, Design Item ID=4_Pin, Pin Count=4, Pins=4, Source=Connectors.SchLib
L1: library part CMP-006-00052-2, "Power Inductor", Current Rating=2.2A, Component Type=Standard, DCR=100mR, Design Item ID=Inductor, Pin Count=2, Pins=2, Source=Discrete.SchLib
LD1: library part CMP-004-00084-3, "SMD LED", Colour=RED, Component Type=Standard, Design Item ID=LED, Pin Count=2, Pins=2, Source=Discrete.SchLib
LD2: library part CMP-079-000113-2, "Intelligent Control LED Integrated Light Source, 3.5 to 5.3 V, -25 to 80 degC, 4-Pin SMD, RoHS, Bulk", Manufacturer="Adafruit Industries", Package Description="4-Pin Surface Mount Device, Body 5 x 5 mm, Pitch 3.3 mm", Case/Package=WS2812B, Component Type=Standard, Datasheet URL=https://cdn-shop.adafruit.com/datasheets/WS2812B.pdf, Datasheet Version=May-13, Design Item ID=CMP-007-00035-3, Manufacturer URL=https://www.adafruit.com/, Mounting Technology=SM, Package Reference=WS2812B, Pin Count=4, RoHS Compliant=False, Source="All Components - 30.06.23 - 18.27.SchLib"
Q1: library part CMP-079-000102-2, "P Channel MOSFET", Component Type=Standard, Design Item ID="PMOS GDS", Pin Count=3, Source=P-MOS.SchLib
Q2: library part CMP-079-000093-2, "N Channel MOSFET", Component Type=Standard, Design Item ID=NMOS, Pin Count=3, Source=N-MOS.SchLib
R1 R2 R3 R4 R5 R6 R7 R8 R9 R10 R11 R12 R13 R14 R15 R16 R17 R18 R19 R20 R21 R22 R23 R24 R25 R26 R27 R28: library part CMP-009-00356-1, "SMD Resistor", Component Type=Standard, Design Item ID=Resistor, Pins=2, Source=Discrete.SchLib
SW1: library part CMP-011-00000-2, "Switch Tactile N.O. SPST Rectangular Button J-Bend 0.02A 15VDC 100000Cycles 5N SMD T/R"
U1: library part CMP-079-000005-5, "7-40VDC-DC buck converter", Case/Package=SOT-23-6, Max Input Voltage=40V, Max Operating Temperature=125°C, Min Input Voltage=4V, Min Operating Temperature=-40°C, Min Output Voltage=765mV, Output Current=1A, Switching Frequency=850kHz, Component Type=Standard, Design Item ID=CMP-00007-1, Features=UVLO, Max Output Voltage=40V, Mount="Surface Mount", Number of Outputs=1, Output Configuration=Positive, Output Type=Adjustable, Packaging="Cut Tape", Pin Count=6, Source="All Components - 30.06.23 - 18.27.SchLib", Synchronous Rectifier=No
U2: library part CMP-015-00000-3, "RS-485 transceiver with slew rate control, integrated switchable termination and duplex switching 16-VQFN -40 to 125"
U3: library part CMP-079-000096-2, "ESD Protection Doide Array", Component Type=Standard, Design Item ID=NUP4304MR6, Pin Count=6, Source="ON Semi.SchLib"
U4 U5: library part CMP-019-00001-1, "Fixed Positive LDO Regulator, 3.3V, 0.22V Dropout, CMOS", Case/Package=HVSON, Max Supply Voltage=6V, Pins=6, RoHS Compliant=Yes
U6: library part CMP-010-00004-2, "SGX Sensortech IR CO2 Sensor Module"
U7: library part CMP-010-00003-2, "SGX Sensortech Electrochemical O2 Sensor Module"
U8: library part CMP-079-000089-1, "Voltage Reference", Component Type=Standard, Design Item ID=MCP1501, Pin Count=6, Source=Microchip.SchLib
U9 U11 U13: library part CMP-014-00005-3, "Op Amp Dual Precision Amplifier R-R I/O 5.5V Automotive 8-Pin MSOP Tube", Case/Package=MSOP, Max Operating Temperature=125°C, Max Supply Voltage=5.5V, Min Operating Temperature=-40°C, Min Supply Voltage=1.8V, Mounting Technology="Surface Mount", Pins=8
U10: library part CMP-014-00004-1, "Ultra-high precision (2 µV), zero-drift (0.003 µV/C), low-input-bias-current op amp (single) 5-SOT-23 -40 to 125", Case/Package=SOT-23, Max Operating Temperature=125°C, Max Supply Voltage=5.5V, Min Operating Temperature=-40°C, Min Supply Voltage=1.7V, Pins=5
U12: library part CMP-079-000006-3, "ATMEL         ATSAMD21E17A-MU            32 Bit Microcontroller, SAM D Series, ARM Cortex-M0+, 48 MHz, 128 KB, 16 KB, 32 Pins, QFN", Case/Package=QFN, Clock Frequency=32MHz, Frequency=48MHz, Max Operating Temperature=85°C, Max Supply Voltage=3.63V, Min Operating Temperature=-40°C, Min Supply Voltage=1.62V, Nominal Supply Voltage=3.3V, Package Shape=Square, Package Style="CHIP CARRIER, HEAT SINK/SLUG, VERY THIN PROFILEMeter", Temperature Grade=AUTOMOTIVE, Component Type=Standard, Contact Plating=Tin,Matte, Core Architecture=ARM, Data Bus Width=32b, Design Item ID=CMP-00013-1, Height - Seated (Max)=1mm, Interface=I2C,SPI,UART,USART,LIN,USB,I2S, JESD-30 Code=S-XQCC-N32, Lead Free="Lead Free", Length=5mm, Max Frequency=48MHz, Memory Size=128KB, Memory Type=FLASH, Mount="Surface Mount", Number of I/O Lines=26, Number of I/Os=26, Number of Pins=32, Number of Programmable I/O=26, Number of Timers/Counters=6, Operating Supply Voltage=3.3V, Oscillator Type=Internal, Packaging=Tray, Peripherals="Brown-out Detect/Reset,POR,PWM,WDT,DMA", Pin Count=33, Pins=32, RAM Size=16KB, REACH SVHC="No SVHC", RoHS Compliant=Yes, Source="All Components - 30.06.23 - 18.27.SchLib", Speed=48RPM, Surface Mount=Yes, Technology=CMOS, Terminal Form="No Lead", Terminal Pitch=0.5mm, Terminal Position=QUAD, Watchdog Timer=Yes, Width=5mm
U14: library part CMP-079-000038-2, "Board Mount Humidity Sensors Ultra-High Accuracy Digital Humidity & Temperature Sensor with 1.0%RH and 0.1C tolerances and 1.08 ... 3.6 V supply voltage. Integrated high-power heater, on-chip protection options availabel, NIST tracable.", Component Type=Standard, Design Item ID=CMP-00047-1, Pin Count=4, Source="All Components - 30.06.23 - 18.27.SchLib"
USB1: library part CMP-079-000004-4, "Vertical or RA Type C Usb Connector Rohs Compliant: Yes", Component Type=Standard, Design Item ID=CMP-00005-5, Pin Count=26, Source="All Components - 30.06.23 - 18.27.SchLib"
X1: library part CMP-003-00061-3, "Low Profile Crystal, 32.768 kHz, +/- 20 ppm, 12.5 pF, -40 to 85 degC, 2-Pin SMD, Pb-Free, Tape and Reel", Case/Package=CSMD, Frequency=32.768kHz, Frequency Tolerance=20ppm, Load Capacitance=12.5pF, Manufacturer=Abracon, Max Operating Temperature=85°C, Min Operating Temperature=-40°C, Package Description="2-Pin Surface Mount Device, Body 3.2 x 1.5 mm", Package Quantity=3000, Package Reference=ABS07-2, Component Type=Standard, Datasheet URL=http://www.abracon.com/Resonators/ABS07.pdf, Datasheet Version=Aug-15, Design Item ID=CMP-003-00022-1, ESR=70k, Manufacturer URL=http://www.abracon.com/, Mounting Technology=SM, Package URL=http://www.abracon.com/Support/PackageDrawing/Resonators/ABS07.PDF, Packaging=TapeandReel, Pins=2, RoHS Compliant=True, Source="All Components - 30.06.23 - 18.27.SchLib", Tolerance=20ppm

## Free pads (board coordinates)
  rect 4x1.25 hole 0.8 copper offset 1,0: 1(84,104) 2(84,102) 3(84,100) 4(84,98)
  round 6 hole 3.2: ""(30,30) ""(30,90) ""(110,30) ""(110,90)
  round 0 hole 3.2 unplated: ""(61,101) ""(79,101)
  rect 0x0 hole 5 unplated copper offset 1,0: ""(94,80)

## Via types
v1: diameter 0.6, hole 0.3, Top Layer to Bottom Layer, tented both sides, 121 vias

## Nets (pads, with @x,y where several pads share a name; then routed paths per layer and width w, separated by ;. In a path a pad name is that pad's centre, name@x,y a point inside that pad or via, vN(x,y) a via of type N, cw(c..) or ccw(c..) an arc to the next point about the centre after c; other vN are vias at no path point)
+3V3: C9.2 C12.1 C21.1 C23.1 C31.1 C32.1 J1.1 J7.2 J8.1 LD2.1 R2.1 R4.1 R27.2 R28.2 U2.7 U2.8 U2.13 U2.15 U4.4 U4.5 U6.2 U12.30 | length 75.5
  Top Layer w0.2: v1(73.911,42.15) 74.1,42.15 C31.1
  Top Layer w0.25: C9.2 44.79,51.7 45.501,52.411 46.25,52.411 U2.13 ; v1(46.4,51.1) 46.4,51.146 U2.15 ; U2.8 49.272,55.433 49.433,55.433 v1(49.5,55.5) 49.475,55.475 49.475,54.929 U2.7 ; U12.30 v1(73.911,42.15)
  Top Layer w0.3: C31.1 74.35,41.9 74.45,41.9 75.5,40.85 C32.1
  Top Layer w0.4: U4.4 49.025,39.65 49.775,40.4 ; U4.5 49.025,40.6 49.225,40.4 49.775,40.4 ; C12.1 49.775,40.4
  Top Layer w0.5: v1(36,63.75) 34.9,64.85 34.9,88.6 C23.1 37.4,92.25 LD2.1 ; v1(37.75,63.75) 37.75,68.85 46.36,77.46 U6.2 53.38,77.37 58.2,72.55 C21.1
  other v1: 87.9,26.7 86.3,33.2 78.4,35.9 67,37.4 69.6,37.4 50.7,39.8 44.4,52
+3V3_S: C34.2 pad.4 U14.3 | length 10.9
  Bottom Layer w0.25: C34.2 75.5,100.2 77.7,98 pad.4
  other v1: 73.425,100.275
+3V3ANA: C11.1 C16.1 C17.1 C18.1 C27.1 C28.1 C29.1 U5.4 U5.5 U8.4 U8.6 U10.5 U12.9 U13.8 | length 16.8
  Top Layer w0.25: U12.9 70.5,48.036 C29.1
  Top Layer w0.3: U5.4 53.075,45.95 53.8,46.675 53.8,46.9 ; U5.5 53.8,46.9 ; C11.1 54.4,46.9 53.8,46.9 ; C27.1 69,49.65 69.9,48.75 C29.1 ; C18.1 72.606,74.2 72.75,74.056 U10.5 ; U8.4 84.85,49.05 C17.1 ; U8.6 83.5,50.75 83.895,50.75 84.25,50.395 84.25,50 85,49.25 C17.1 ; C16.1 C17.1 ; U13.8 88.754,51.479 88.754,53.254 C28.1
  other v1: 54.5,47.6 70.2,48.4 85.6,49.6 88.754,52.366 71.753,74.2
+5V: C5.1 C6.1 C7.2 C8.1 C13.1 C14.1 C15.1 C22.1 D1.1 J7.1 L1.2 R1.2 U2.14 U3.2 U4.1 U4.3 U4.6 U5.1 U5.3 U5.6 U9.8 U11.8 | length 106.3
  Top Layer w0.25: R1.2 C8.1 ; C8.1@43.25,35.75 43.975,36.475 49.375,36.475 50.5,35.35 C6.1 ; C7.2 45.4,50.95 47.9,48.45 ; C7.2@45.4,51.05 46.075,51.725 46.271,51.725 U2.14
  Top Layer w0.4: 44.7,39.6 44.75,39.65 U4.3 ; 44.7,41.1 45.125,41.1 45.575,41.55 U4.1 46.025,41.55 46.475,42 48.125,42 48.575,41.55 U4.6 ; 48.431,47.126 48.851,47.126 49.575,47.85 U5.1 50.025,47.85 50.475,48.3 52.125,48.3 52.575,47.85 U5.6 ; 48.8,45.829 48.921,45.95 U5.3 ; C15.1 52.615,55.015 54.34,55.015 U9.8
  Top Layer w0.44: U11.8 47.65,61.2 48.3,60.55 C22.1 ; L1.2 58.48,33.55 59.068,34.138 59.56,34.63 59.56,40.609 60.78,41.829 J7.1
  Top Layer w0.6: C13.1 43.6,41.45 43.7,41.35 44.45,41.35 44.7,41.1 ; C14.1@47.9,47.65 48.424,47.126 48.431,47.126 48.8,46.757 48.8,45.829 48.8,44.9 48,44.1 46.4,44.1 44.7,42.4 44.7,41.1 ; C14.1 47.9,48.45 v1(47.9,49.4) ; C6.1 51.2,35.3 ; v1(52,55) C15.1 ; D1.1 59.068,34.138 57.838,34.138 L1.2 54.45,33.55 52.7,35.3 C5.1 51.2,35.3 ; 44.7,41.1 44.7,39.6 44.7,38.1 45.5,37.3 50.7,37.3 51.2,36.8 51.2,35.3
  Bottom Layer w0.6: v1(47.851,60.949) 48,60.8 48,55.1 48.8,54.3 48.8,53.4 ; v1(47.9,49.4) 47.9,51.6 48.8,52.5 48.8,53.4 ; v1(52,55) 50.4,53.4 48.8,53.4 ; v1(62.8,34.1) 69.9,34.1 v1(71.8,36)
+24V: C2.1 C3.1 C4.1 D3.2 J3.1 LD1.2 Q1.S R9.1 U1.5 | length 116.9
  Top Layer w0.6: C2.1@38.7,26.5 C2.1 ; C4.1 47.396,26.5 47.748,26.851 47.748,28.097 U1.5
  Top Layer w1: 34.25,47.25 34.25,46.385 34.23,46.365 34.25,46.345 34.25,45.5 38.5,45.5 ; C2.1@38.7,26.5 37.2,28 37.2,44.2 38.5,45.5 ; C2.1 v1(40.25,26.5) C3.1 C4.1 ; D3.2 39.75,46.75 38.5,45.5
  Bottom Layer w1: v1(40.25,26.5) v1(42.75,26.5) 58.9,26.5 61.985,29.585 102.385,29.585 111,38.2 J3.1
+24V_IN: J6.1 Q1.D R12.1 | length 13.5
  Top Layer w0.25: Q1.D@30.878,47 30.878,47.05 33.363,49.535 35,49.535 35.16,49.375 35.725,49.375 36,49.1 R12.1
  Top Layer w1: J6.1 28.3,49.559 28.769,49.09 28.769,48.905 Q1.D@28.769,45.095
AREF: R14.1 U8.1 U12.4 U13.3 | length 23.8
  Top Layer w0.25: U12.4 76.829,50.475 77.125,50.475 77.4,50.75 R14.1 ; 79.8,50.95 79.875,50.875 79.875,48.565 80.24,48.2 89.6,48.2 89.987,47.813 89.987,47.188 U13.3
  Top Layer w0.4: R14.1 78.184,50.8 78.334,50.95 79.8,50.95 U8.1
AREF_BUF: J2.1 J4.1 U13.1 U13.2 | length 110.2
  Top Layer w0.4: U13.1 88.735,47.14 88.735,46.334 v1(89.1,45.969) ; U13.2 89.365,47.14 89.365,46.234 v1(89.1,45.969) ; J2.1 110.8,48.5 108.269,45.969 v1(89.1,45.969)
  Bottom Layer w0.4: J4.1 28.8,42 27.6,40.8 27.6,39.1 38.7,28 49.8,28 52.285,30.485 86.385,30.485 89.1,33.2 v1(89.1,45.969)
GND: C2.2 C3.2 C4.2 C5.2 C6.2 C7.1 C8.2 C9.1 C10.1 C11.2 C12.2 C13.2 C14.2 C15.2 C16.2 C17.2 C18.2 C19.1 C20.2 C21.2 C22.2 C23.2 C24.1 C25.2 C26.1 C27.2 C28.2 C29.2 C30.1 C31.2 C32.2 C33.2 D2.2 D3.1 D4.3 J1.3 J1.5 J6.2 J6.5 J6.7 J7.8 J8.4 LD2.3 Q2.3 R3.2 R5.2 R6.2 R10.2 R11.1 R13.2 R16.1 R17.2 R19.2 R21.1 R22.2 R25.1 R26.1 SW1.2 U1.2 U2.6 U2.PAD U3.5 U4.2 U4.PAD U5.2 U5.PAD U6.3 U7.1 U8.2 U8.3 U8.5 U9.4 U10.2 U11.4 U12.10 U12.28 U12.PAD U13.4 USB1.A1 USB1.A12 USB1.B1 USB1.B12 USB1.EXT_SHLD | length 11.6
  Top Layer w0.2: C22.2 v1(48.8,58.9) ; U2.6 U2.6@49.202,53.962 ; v1@50.1,54.86 v1(50.1,54.9) ; v1(69.421,48.215) 69.35,48.144 69.35,47.524 69.412,47.462 69.412,47.356 U12.10 ; U12.28 72.091,42.542 72.573,42.06 72.573,41.933 v1(72.65,41.857) ; v1(73.7,70.4) U10.2
  Top Layer w0.25: U2.6@49.202,53.962 v1@50.1,54.86
  Top Layer w0.5: v1(66.9,33.3) 66.919,33.281 66.919,32.531 USB1.A1 ; USB1.B1 73.581,32.531 73.581,33.281 v1(73.6,33.3)
  Top Layer w0.6: C2.2 C4.2
  other v1: 80.9,26.7 82.9,26.7 85.1,26.7 64.1,27.2 76.4,27.2 40.3,29.5 42.8,29.5 47.75,31.5 51,31.5 103,32.1 42.6,32.7 52,32.75 50.4,33.1 78.4,33.2 52.6,34 78.4,34.5 38.3,34.7 104,35.3 45.4,35.7 74.3,36 105,36.2 42.9,37.2 43.6,39.3 47.3,39.4 76.1,39.5 73.7,40.2 74.4,40.5 46.3,40.6 50.7,42.6 77.6,43.9 70.5,44.5 55,45.4 47.8,45.5 51.3,45.8 46,46 46,46.75 50.3,46.9 77.6,47.1 63,47.3 64.4,47.3 46,47.5 90.8,47.8 92.8,48.8 95.6,48.8 44.9,49 38,49.25 80.6,49.5 43.3,49.7 78.4,50 82.7,50 70.5,50.2 69.5,51.3 85,51.4 86.6,51.4 48,53.1 53.1,53.4 89.3,54.7 59.2,57.3 60.7,58.2 46.355,60.155 52.1,64.6 53.6,65.2 74.8,68.6 77,70.8 57.6,70.9 70.9,72 75.1,77.7 38,89.5 39.9,93.6
GND_S: C34.1 pad.1 U14.4 | length 10.9
  Bottom Layer w0.25: C34.1 75.5,101.8 77.7,104 pad.1
  other v1: 73.45,101.75
GPIO_15: J7.3 U12.16 | length 11.1
  Top Layer w0.25: J7.3 58.24,42.84 59.575,44.175 61.432,44.175 61.882,43.725 64.625,43.725 65.3,44.4 66.864,44.4 U12.16
GPIO_18: J7.4 U12.19 | length 14.1
  Top Layer w0.25: J7.4 58.24,40.06 59.41,41.23 59.41,42.821 60.314,43.725 61.246,43.725 63.196,41.775 66.714,41.775 U12.19
GPIO_19: J7.5 U12.20 | length 17.5
  Top Layer w0.25: v1(62.9,39.8) 64.4,41.3 66.946,41.3 U12.20
  Bottom Layer w0.25: J7.5 55.7,42 56.87,40.83 56.87,39.239 57.774,38.335 61.435,38.335 v1(62.9,39.8)
GPIO_27: J7.6 U12.25 | length 20.6
  Top Layer w0.2: U12.25 71.03,41.472 71.225,41.277 71.225,40.81 71.423,40.611 71.423,40.302 v1(71.5,40.225)
  Bottom Layer w0.2: J7.6 55.7,39.46 57.26,37.9 61.849,37.9 65.874,41.925 69.558,41.925 70.884,40.599 71.025,40.599 71.399,40.225 v1(71.5,40.225)
GPIO_28: J7.7 U12.27 | length 27.3
  Top Layer w0.2: U12.27 71.737,42.188 72.05,41.876 72.05,41.407 72.361,41.095 v1(72.361,41.089)
  Bottom Layer w0.2: J7.7 53.16,42.14 54.5,40.8 54.5,39.104 56.104,37.5 62.099,37.5 65.999,41.4 66.124,41.525 69.326,41.525 69.451,41.4 71.226,39.625 71.825,39.625 72.361,40.161 v1(72.361,41.089)
I2C_SCL: J8.3 R28.1 U12.22 | length 57.8
  Top Layer w0.25: U12.22 68.6,41.539 v1(68.6,39.1) 68.695,39.1 68.87,39.275 69.325,39.275 69.6,39.55 R28.1
  Bottom Layer w0.25: v1(68.6,39.1) 68.95,38.75 76.914,38.75 81.014,42.85 81.05,42.85 98.725,60.525 109.175,60.525 111.5,58.2 J8.3
I2C_SCL_S: pad.2 U14.2 | length 15.6
  Top Layer w0.25: U14.2 71.7,100.6 71.225,101.075 71.225,102.025 71.6,102.4 76.1,102.4 77.1,103.4 80.9,103.4 82.3,102 pad.2
I2C_SDA: J8.2 R27.1 U12.21 | length 54.2
  Top Layer w0.25: R27.1 67.975,39.6 ; v1(68,38.3) 67.975,38.325 67.975,39.359 67.975,39.6 ; U12.21 67.975,41.621 67.975,39.6
  Bottom Layer w0.25: v1(68,38.3) 77.1,38.3 81.2,42.4 81.236,42.4 98.336,59.5 J8.2
I2C_SDA_S: pad.3 U14.1 | length 14.2
  Top Layer w0.25: U14.1 71.9,101.4 72.546,100.754 72.546,100.271 73.166,99.65 76.05,99.65 77.1,98.6 80.9,98.6 82.3,100 pad.3
LED_DAT: LD2.4 U12.15 | length 62.9
  Top Layer w0.25: v1(36.6,93.3) 36.658,93.3 36.908,93.55 LD2.4 ; v1(62.1,49.5) 63.216,49.5 66.941,45.775 67.457,45.775 U12.15
  Bottom Layer w0.25: v1(36.6,93.3) 36.6,75 v1(62.1,49.5)
NetC1_1: C1.1 D2.1 L1.1 U1.6 | length 15.8
  Top Layer w0.25: C1.1 49.275,32.675 49.275,31.518 49.862,30.931 49.862,28.862
  Top Layer w1: 49,27.25 49.25,27.5 49.25,28.25 49.862,28.862 D2.1 56.888,28.862 L1.1@57.75,28 ; L1.1@56.45,28.75 L1.1
NetC1_2: C1.2 U1.1 | length 4.6
  Top Layer w0.25: U1.1 48.7,31.94 48.275,32.365 48.275,33.775 49,34.5 C1.2
NetC19_2: C19.2 R14.2 | length 1.8
  Top Layer w0.4: R14.2 78.25,49.2 78.9,48.55 C19.2
NetC25_1: C25.1 U12.2 X1.2 | length 5.6
  Top Layer w0.2: U12.2 73.53,45.762 74.612,45.762 75.6,46.75 76.4,46.75 76.9,46.25 C25.1
NetC26_2: C26.2 U12.1 X1.1 | length 5
  Top Layer w0.2: U12.1 73.836,44.7 75.55,44.7 X1.1 76.4,44.25 76.9,44.75 C26.2
NetC33_1: C33.1 U12.29 | length 2
  Top Layer w0.25: U12.29 72.872,42.482 72.909,42.482 73.275,42.116 73.275,41.375 73.25,41.35 C33.1
NetJ3_2: J3.2 Q2.2 | length 9.6
  Top Layer w1: Q2.2 105.8,38 110.8,43 J3.2
NetLD1_1: LD1.1 R10.1 | length 2.9
  Top Layer w0.4: LD1.1 39.8,32.5 39.8,35.1 R10.1@39.9,35.2
NetQ1_G: Q1.G R12.2 R13.1 | length 3.9
  Top Layer w0.25: Q1.G 34.56,48.905 35.691,47.775 35.725,47.775 36,47.5 R12.2 R13.1
NetQ2_1: Q2.1 R24.1 R25.2 | length 3.7
  Top Layer w0.25: R24.1 R25.2 Q2.1
NetR1_1: R1.1 R3.1 U1.3 | length 4.8
  Top Layer w0.25: R1.1 R3.1 44.85,32.75 46.509,31.091 46.633,31.091 46.8,30.923 U1.3
NetR5_1: R5.1 USB1.A5 | length 11.4
  Top Layer w0.2: R5.1 63.438,28.862 63.438,29.433 62.59,30.28 62.59,31.443 65.048,33.9 68.205,33.9 68.95,33.155 68.95,32.55 USB1.A5
NetR6_1: R6.1 USB1.B5 | length 9.4
  Top Layer w0.2: USB1.B5 72,32.925 72.05,32.975 72.05,33.141 72.809,33.9 74.286,33.9 77,31.186 R6.1
NetR7_1: R7.1 U2.10 | length 3.1
  Top Layer w0.25: R7.1 44.4,55.05 44.675,54.775 46.679,54.775 U2.10
NetR8_2: R8.2 U2.9 | length 2.1
  Top Layer w0.25: R8.2 46,55.95 46.275,55.675 46.486,55.675 U2.9
NetR15_1: R15.1 R20.2 U10.1 | length 8
  Top Layer w0.4: R15.1 72.725,68.625 72.725,71.425 72.856,71.556 72.856,72.261 73.456,72.861 73.456,74.639 72.9,75.196 R20.2
NetR16_2: R16.2 U7.2 U10.3 | length 13.5
  Top Layer w0.4: U10.3 74.65,71.989 75.881,73.219 ; R16.2 76.5,72.45 75.881,73.069 75.881,73.219 ; U7.2 82.661,80 75.881,73.219
NetR17_1: R17.1 R18.1 U9.2 | length 4.6
  Top Layer w0.25: U9.2 60.425,55.675 60.7,55.95 R17.1 ; R17.1@60.7,56.05 61.925,57.275 62.125,57.275 62.4,57.55 R18.1
NetR18_2: R18.2 U9.1 U9.5 | length 9.3
  Top Layer w0.25: U9.5 55.525,56.975 57.5,55 58.625,55 U9.1 61.475,55.025 62.4,55.95 R18.2
NetR19_1: R19.1 R20.1 U10.4 | length 4.8
  Top Layer w0.4: R20.1 72.9,77.65 74.2,76.35 74.4,76.35 74.6,76.15 R19.1 74.625,76.075 74.625,73.775 U10.4
NetR22_1: R22.1 R23.1 U11.2 | length 3.9
  Top Layer w0.25: U11.2 53.625,62.975 ; R23.1 53.925,62.175 53.925,62.675 53.625,62.975 ; R22.1 54.2,63.55 53.625,62.975
NetR23_2: R23.2 U11.1 U11.5 | length 8.3
  Top Layer w0.25: U11.5 48.825,64.275 50.775,62.325 U11.1 52.271,62.325 52.363,62.233 52.363,62.187 54.2,60.35 R23.2
NTC_AMB: C30.2 J4.2 R26.2 U12.6 | length 51.7
  Top Layer w0.25: C30.2 63.7,45.1 ; v1(63.7,44.35) 63.7,45.1 ; R26.2 63.7,45.1 ; U12.6 72.433,47.494 72.433,47.833 v1(72.5,47.9)
  Bottom Layer w0.25: J4.2 38.9,40 43.2,44.3 63.65,44.3 v1(63.7,44.35) 65.35,42.7 67.3,42.7 v1(72.5,47.9)
NTC_HEAT: C24.2 J2.2 R21.2 U12.5 | length 42.1
  Top Layer w0.25: U12.5 74.575,48.929 74.575,49.285 77.315,52.025 86.997,52.025 88.522,50.5 J2.2
PWM_HEAT: R24.2 U12.14 | length 44.6
  Top Layer w0.25: v1(67.2,46.4) 67.267,46.333 67.606,46.333 U12.14 ; v1(82.071,47.039) 82.071,44.429 94.4,32.1 R24.2
  Bottom Layer w0.25: v1(67.2,46.4) 68.626,47.826 68.926,47.826 69.162,47.59 69.68,47.59 69.903,47.813 69.941,47.775 70.459,47.775 70.825,48.141 70.825,48.5 71.7,48.5 71.725,48.525 80.585,48.525 v1(82.071,47.039)
RESET: C10.2 J1.10 R4.2 SW1.1 U12.26 | length 29.7
  Top Layer w0.2: U12.26 71.384,41.835 71.65,41.569 71.65,41.124 71.646,41.12 71.646,40.954 72.7,39.9 72.7,39.224 77.6,34.324 77.6,30.9 78.4,30.1 81.9,30.1 ; SW1.1@80.225,28.225 80.3,28.3 81.9,28.3 ; J1.10 83.423,30.96 82.563,30.1 81.9,30.1 ; R4.2 C10.2 81.9,28.3 ; 81.9,28.3 81.9,30.1
RS485_A: D4.1 J6.3 R8.1 | length 22.4
  Top Layer w0.25: J6.3 31.115,57.815 41.597,57.815 44.192,60.41 ; D4.1 44.192,60.41 ; R8.1 46,58.602 44.192,60.41
RS485_B: D4.2 J6.4 R7.2 | length 16
  Top Layer w0.25: J6.4 42.3,56.5 44.4,58.6 ; D4.2 44.27,59.25 44.4,59.12 44.4,58.6 ; R7.2 44.4,58.6
RS485_DE: U2.2 U2.3 U12.13 | length 22.9
  Top Layer w0.25: U2.2 49.043,51.703 49.75,51.703 ; U2.3 49.75,51.703 ; U12.13 64.471,50.175 51.241,50.175 50.797,50.619 50.797,50.656 49.75,51.703
RS485_RX: U2.1 U12.12 | length 22.5
  Top Layer w0.25: U2.1 49.2,50.839 v1(49.2,50.8) ; v1(51.5,50.8) 64.554,50.8 U12.12
  Bottom Layer w0.25: v1(49.2,50.8) v1(51.5,50.8)
RS485_TERM: U2.5 U12.8 | length 26
  Top Layer w0.25: U2.5 50.951,52.2 69.484,52.2 71.225,50.459 71.225,47.7 U12.8
RS485_TX: U2.4 U12.11 | length 22.1
  Top Layer w0.25: U2.4 50.611,51.55 64.511,51.55 U12.11
SWCLK: J1.4 R2.2 U12.31 | length 17.4
  Top Layer w0.2: U12.31 73.968,42.8 74.8,42.8 78.359,39.241 78.951,39.241 83.423,34.77 J1.4 86.87,34.77 R2.2
SWDIO: J1.2 U12.32 | length 14
  Top Layer w0.2: U12.32 74.12,43.354 75.011,43.354 78.666,39.7 79.763,39.7 83.423,36.04 J1.2
UART_CO2_RX: U6.1 U12.18 | length 40
  Top Layer w0.25: v1(66.135,43.325) 67.557,43.325 U12.18
  Bottom Layer w0.25: U6.1 66.135,58.11 v1(66.135,43.325)
UART_CO2_TX: U6.4 U12.17 | length 58.6
  Top Layer w0.25: v1(65.371,43.563) 65.466,43.563 65.854,43.95 67.154,43.95 67.315,43.789 U12.17
  Bottom Layer w0.25: U6.4 45.535,85.335 42.9,82.7 42.9,78 65.371,55.529 v1(65.371,43.563)
USB_D_N: U3.3 U12.23 USB1.A7 USB1.B7 | length 13.3
  Top Layer w0.2: USB1.B7 69.55,32.55 69.55,33.155 69.77,33.375 70.23,33.375 70.5,33.105 70.5,33.1 ; U12.23 69.616,41.835 69.1,41.319 69.1,41 69.45,40.65 70.05,40.65 70.45,40.25 70.45,36.8 70.3,36.65 70.3,35.726 70.726,35.3 71.05,35.3 U3.3 71.3,34.336 70.55,33.586 70.55,33.15 70.5,33.1 ; USB1.A7 70.5,33.1
USB_D_P: U3.1 U12.24 USB1.A6 USB1.B6 | length 13.3
  Top Layer w0.2: U12.24 70.9,40.564 70.9,37.2 71.15,36.95 U3.1 71.55,36.7 71.949,36.7 72.4,36.249 72.4,35.751 72.1,35.451 72.1,34.5 71,33.4 USB1.B6 70.95,32.45 70.95,31.845 70.73,31.625 70.27,31.625 70.05,31.845 70.05,32.45 USB1.A6
V_CO2_SENS: U6.5 U11.3 | length 20.2
  Top Layer w0.25: v1(46.5,75.9) 45.8,75.2 45.8,68.6 50.775,63.625 U11.3
  Bottom Layer w0.25: U6.5 46.433,79.327 46.433,75.967 v1(46.5,75.9)
V_O2_SENS: C20.1 R15.2 U9.3 U12.7 | length 38.7
  Top Layer w0.25: U9.3 58.221,56.325 58.121,56.425 58.047,56.425 57.725,56.747 57.725,57.725 58.7,58.7 60.316,58.7 60.516,58.9 71.875,58.9 ; U12.7 71.875,47.643 71.875,58.9 ; R15.2 72.7,66.95 72.425,66.675 72.375,66.675 71.875,66.175 71.875,58.9
  Top Layer w0.4: R15.2 C20.1
VBUS: D1.2 USB1.A4 USB1.A9 USB1.B4 USB1.B9 | length 12
  Top Layer w0.3: USB1.B9 68,32.45 68,31.75 68.174,31.576 68.174,31.075 ; 71.68,31.075 71.751,31.075 72.5,31.824 72.5,32.45 USB1.A9
  Top Layer w0.5: D1.2 63.652,30.862 64.079,30.435 67.456,30.435 68.135,31.114 68.174,31.075 71.68,31.075
VOUT_CO2: J6.8 U11.6 U11.7 | length 17.5
  Top Layer w0.4: J6.8 32.311,62.5 32.786,62.975 46.3,62.975 ; U11.7 46.3,62.975 ; U11.6 47.64,63.615 46.94,63.615 46.3,62.975
VOUT_O2: J6.6 U9.6 U9.7 | length 28.2
  Top Layer w0.4: J6.6 34.5,62 45.5,62 47.2,60.3 47.2,58.5 49.375,56.325 53.2,56.325 ; U9.7 53.975,55.675 53.325,56.325 53.2,56.325 ; U9.6 53.2,56.325
VPSU_FB: R9.2 R11.2 U12.3 | length 46
  Top Layer w0.25: R9.2 R11.2 ; U12.3 73.525,46.464 74.164,46.464 v1(74.2,46.5)
  Bottom Layer w0.25: v1(40.8,36.7) 41.1,36.4 43.5,36.4 44.175,37.075 62.275,37.075 66.3,41.1 69.15,41.1 71.05,39.2 72.7,39.2 72.9,39.4 72.9,40.6 73.275,40.975 73.275,42.2 73.2,42.275 73.2,43.5 74.3,44.6 74.3,45.453 74.2,45.553 v1(74.2,46.5)
pads on no net: CAP. J1.6 J1.7 J1.8 J1.9 J6. J8. LD2.2 U1.4 U2.11 U2.12 U2.16 U3.4 U3.6 U6.6 U7. U13.5 U13.6 U13.7 USB1. USB1.A8 USB1.B8

## Polygon pours and split planes (outlines as drawn)
GND on Bottom Layer "GND_L04_P001" (solid, pour order 1): 30,25 25,30 25,90 30,95 110,95 115,90 115,30 110,25
GND on Top Layer "GND_L01_P000" (solid, pour order 0): 30,25 25,30 25,90 30,95 110,95 115,90 115,30 110,25
+3V3ANA on Int2 (PWR) (split plane): 62.499,95.802 62.538,95.609 62.554,95.555 62.567,95.513 62.642,95.331 62.657,95.304 62.689,95.243 62.799,95.079 62.824,95.049 62.862,95.002 63.002,94.862 63.044,94.827 63.079,94.799 63.243,94.689 63.29,94.664 63.331,94.642 63.513,94.567 63.555,94.554 63.609,94.538 63.802,94.499 63.882,94.491 63.902,94.49 64,94.49 83,94.49 83.098,94.49 83.118,94.491 83.198,94.499 83.391,94.538 83.404,94.542 83.487,94.567 83.669,94.642 83.715,94.667 83.757,94.689 83.921,94.799 83.96,94.831 83.998,94.862 84.138,95.002 84.166,95.036 84.201,95.079 84.311,95.243 84.325,95.269 84.358,95.331 84.433,95.513 84.462,95.609 84.501,95.802 84.502,95.82 84.504,95.802 84.542,95.61 84.571,95.514 84.646,95.333 84.668,95.292 84.694,95.245 84.803,95.082 84.827,95.052 84.866,95.005 85.005,94.866 85.055,94.825 85.082,94.803 85.245,94.694 85.292,94.668 85.333,94.646 85.514,94.571 85.61,94.542 85.802,94.504 85.84,94.5 85.877,94.495 85.975,94.49 85.988,94.491 86,94.49 109.789,94.49 114.49,89.789 114.49,64.752 103.8,64.752 103.735,64.744 103.674,64.718 103.644,64.696 103.622,64.678 87.696,48.752 74.1,48.752 74.035,48.744 73.974,48.718 73.944,48.696 73.922,48.678 71.696,46.452 54.104,46.452 52.752,47.804 52.752,54.3 52.744,54.365 52.726,54.408 52.718,54.426 52.701,54.449 52.678,54.478 42.37,64.787 42.346,64.805 42.322,64.824 42.32,64.825 42.318,64.827 42.289,64.839 42.262,64.851 42.259,64.851 42.257,64.852 42.227,64.856 42.197,64.861 42.194,64.86 42.191,64.861 42.161,64.857 42.131,64.853 42.126,64.852 25.51,64.852 25.51,89.789 30.211,94.49 61,94.49 61.012,94.491 61.025,94.49 61.123,94.495 61.16,94.5 61.198,94.504 61.39,94.542 61.486,94.571 61.667,94.646 61.708,94.668 61.755,94.694 61.918,94.803 61.948,94.827 61.995,94.866 62.134,95.005 62.175,95.055 62.197,95.082 62.306,95.245 62.332,95.292 62.354,95.333 62.429,95.514 62.458,95.61 62.496,95.802 62.498,95.82
+3V3 on Int2 (PWR) (split plane): 52.248,54.196 52.248,47.7 52.256,47.635 52.282,47.574 52.322,47.522 53.822,46.022 53.874,45.982 53.935,45.956 54,45.948 71.8,45.948 71.865,45.956 71.926,45.982 71.978,46.022 74.204,48.248 87.8,48.248 87.865,48.256 87.926,48.282 87.978,48.322 103.904,64.248 114.49,64.248 114.49,30.211 109.789,25.51 30.211,25.51 25.51,30.211 25.51,64.348 42.096,64.348
+3V3ANA on Int2 (PWR) (split plane): 153 vertices, not listed, extent 57.51,96.18 86.49,104.49
GND on Int1 (GND) (split plane): 62.499,95.802 62.538,95.609 62.554,95.555 62.567,95.513 62.642,95.331 62.657,95.304 62.689,95.243 62.799,95.079 62.824,95.049 62.862,95.002 63.002,94.862 63.044,94.827 63.079,94.799 63.243,94.689 63.29,94.664 63.331,94.642 63.513,94.567 63.555,94.554 63.609,94.538 63.802,94.499 63.882,94.491 63.902,94.49 64,94.49 83,94.49 83.098,94.49 83.118,94.491 83.198,94.499 83.391,94.538 83.404,94.542 83.487,94.567 83.669,94.642 83.715,94.667 83.757,94.689 83.921,94.799 83.96,94.831 83.998,94.862 84.138,95.002 84.166,95.036 84.201,95.079 84.311,95.243 84.325,95.269 84.358,95.331 84.433,95.513 84.462,95.609 84.501,95.802 84.502,95.82 84.504,95.802 84.542,95.61 84.571,95.514 84.646,95.333 84.668,95.292 84.694,95.245 84.803,95.082 84.827,95.052 84.866,95.005 85.005,94.866 85.055,94.825 85.082,94.803 85.245,94.694 85.292,94.668 85.333,94.646 85.514,94.571 85.61,94.542 85.802,94.504 85.84,94.5 85.877,94.495 85.975,94.49 85.988,94.491 86,94.49 109.789,94.49 114.49,89.789 114.49,30.211 109.789,25.51 30.211,25.51 25.51,30.211 25.51,89.789 30.211,94.49 61,94.49 61.012,94.491 61.025,94.49 61.123,94.495 61.16,94.5 61.198,94.504 61.39,94.542 61.486,94.571 61.667,94.646 61.708,94.668 61.755,94.694 61.918,94.803 61.948,94.827 61.995,94.866 62.134,95.005 62.175,95.055 62.197,95.082 62.306,95.245 62.332,95.292 62.354,95.333 62.429,95.514 62.458,95.61 62.496,95.802 62.498,95.82
GND on Int1 (GND) (split plane): 153 vertices, not listed, extent 57.51,96.18 86.49,104.49

## Other copper
Int2 (PWR) (plane layer: these items are gaps in the copper):
  lines w0.5: 25.5,64.6 42.157,64.6 42.191,64.609 52.5,54.3 52.5,47.7 54,46.2 61.3,46.2 71.8,46.2 74.1,48.5 87.8,48.5 103.8,64.5 114.9,64.5

## Silkscreen, mask and mechanical layers (free items; w line width, h text height)
Top Overlay:
  drawing of 68 lines, arcs and shapes, not listed
  text "O2 & CO2 Gas Analyser / Version 1.1 Dec 2025" at 54.5,84.901 h3
  text "CO2" at 30.352,64.893 h2
  text "0V" at 25.306,60.493 h2
  text "3V" at 112.501,60.493 h2
  text "O2" at 25.201,58.993 h2
  text "Dt" at 112.609,59.001 h2
  text "0V" at 25.306,57.493 h2
  text "Ck" at 112.51,57.493 h2
  text "B" at 25.431,55.993 h2
  text "0V" at 112.506,55.993 h2
  text "I2C Sensor" at 102.507,54.5 h2 r90
  text "A" at 25.348,54.493 h2
  text "0V" at 25.306,52.993 h2
  text "Main Connector" at 39.14,52.252 h2 r90
  text "24" at 25.389,51.485 h2
  text "Heat / Sense" at 103.64,46.187 h2 r90
  text "10k NTC" at 104.778,45.193 h2
  text "28" at 52.303,43.993 h2
  text "19" at 54.844,43.993 h2
  text "15" at 57.342,43.993 h2
  text "-" at 103.795,42.63 h2
  text "5V" at 62.399,41.901 h2
  text "+" at 103.623,40.494 h2
  text "Heat / Out" at 103.64,38.687 h2 r90
  text "24V 500mA" at 104.31,37.793 h2
  text "Amb / Sense" at 39.39,37.687 h2 r90
  text "0V" at 52.206,37.093 h2
  text "27" at 54.804,37.085 h2
  text "18" at 57.343,37.093 h2
  text "3V3" at 59.658,37.093 h2
  text "10k NTC" at 28.378,36.693 h2
Bottom Overlay:
  drawing of 316 lines, arcs and shapes, not listed
  text "-" at 82.605,103.63 h2
  text "C" at 82.793,101.493 h2
  text "D" at 82.766,99.493 h2
  text "SHT45 Sensor" at 71.961,98.852 h2
  text "+" at 82.777,97.494 h2
Top Assembly:
  pour cut-out: 64,95 cw(c64,96) 63,96 cw(c64,96) 64,97 83,97 cw(c83,96) 84,96 cw(c83,96) 83,95

## Text inside footprints (layer, text, board x,y; h text height)
U7: Top Overlay "-" at 89.7,70.097 h3; Top Overlay "+" at 80.2,79.311 h3